# Altium PCB FMCWRadar.PcbDoc (part 1 of 5)
Units mil, origin at the board's own origin, x right, y up, seen from the top; angles counter-clockwise.
Board outline 4763.78 x 3464.57 mil, 6 copper layers (L1, L2(GND), L3, L4, L5(GND), L6), stack 32.112 mil thick; 306 components, 195 nets, 1057 pads, 1126 vias.
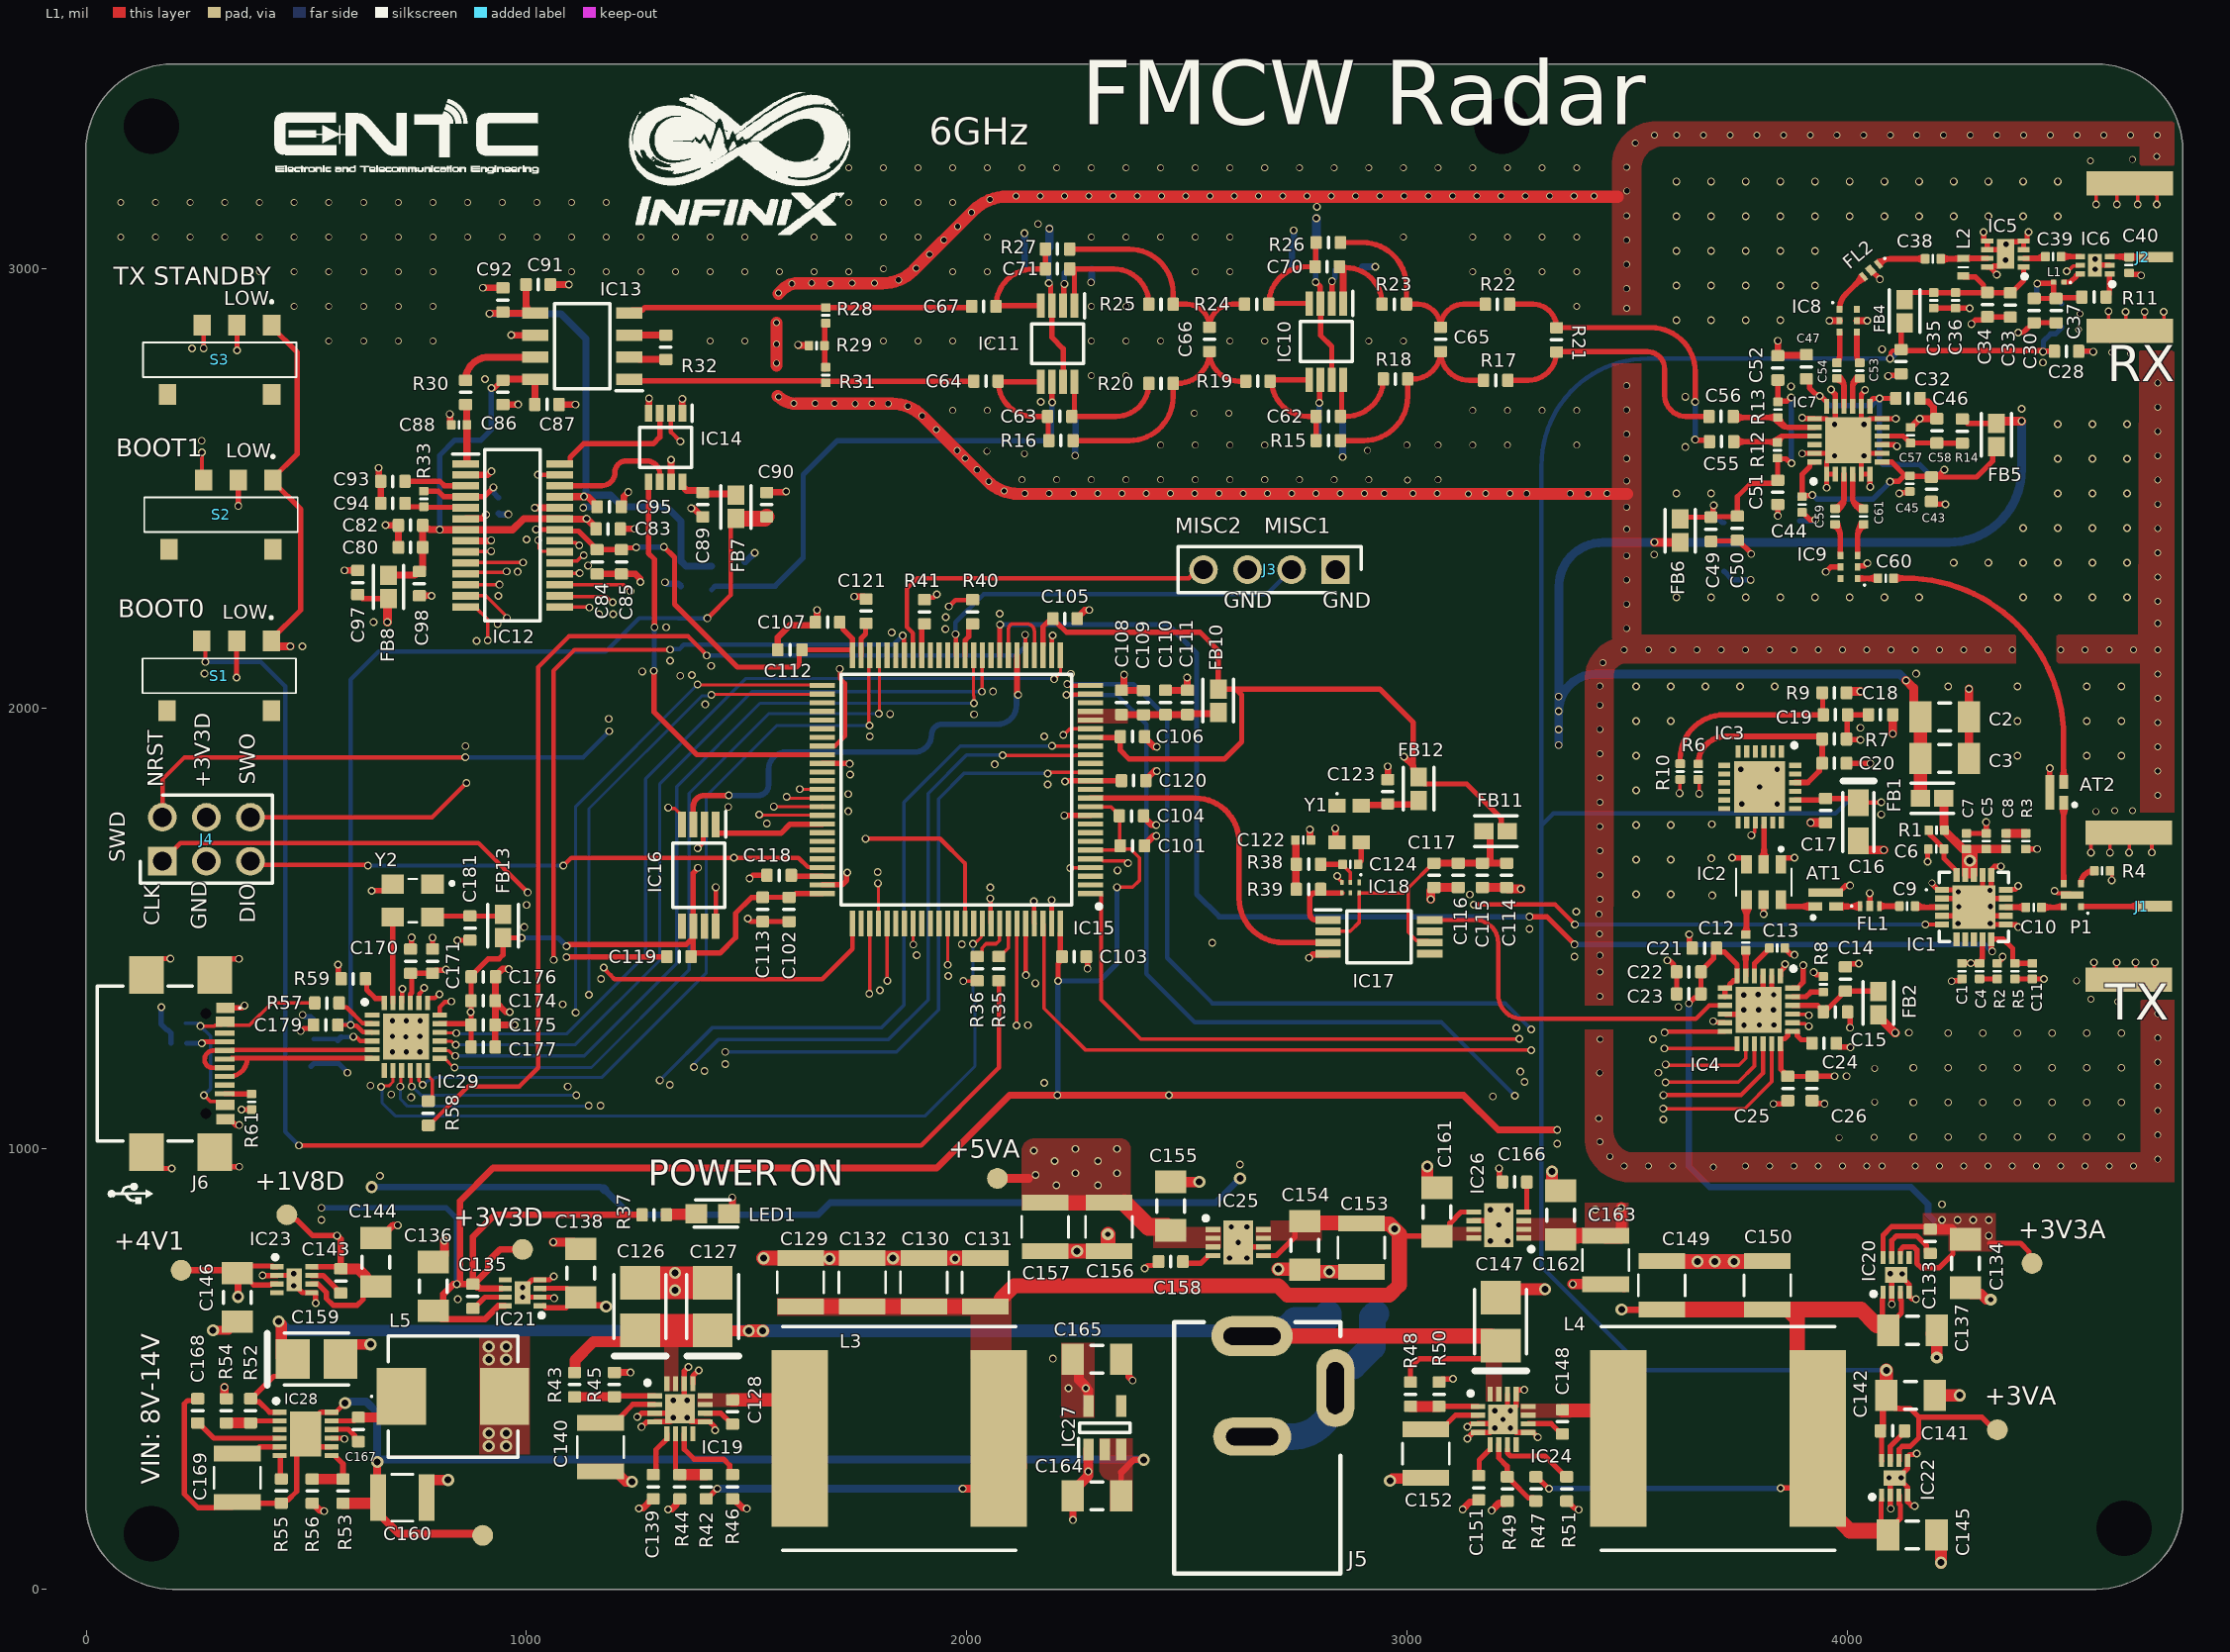
[diagram p0: L1 view]
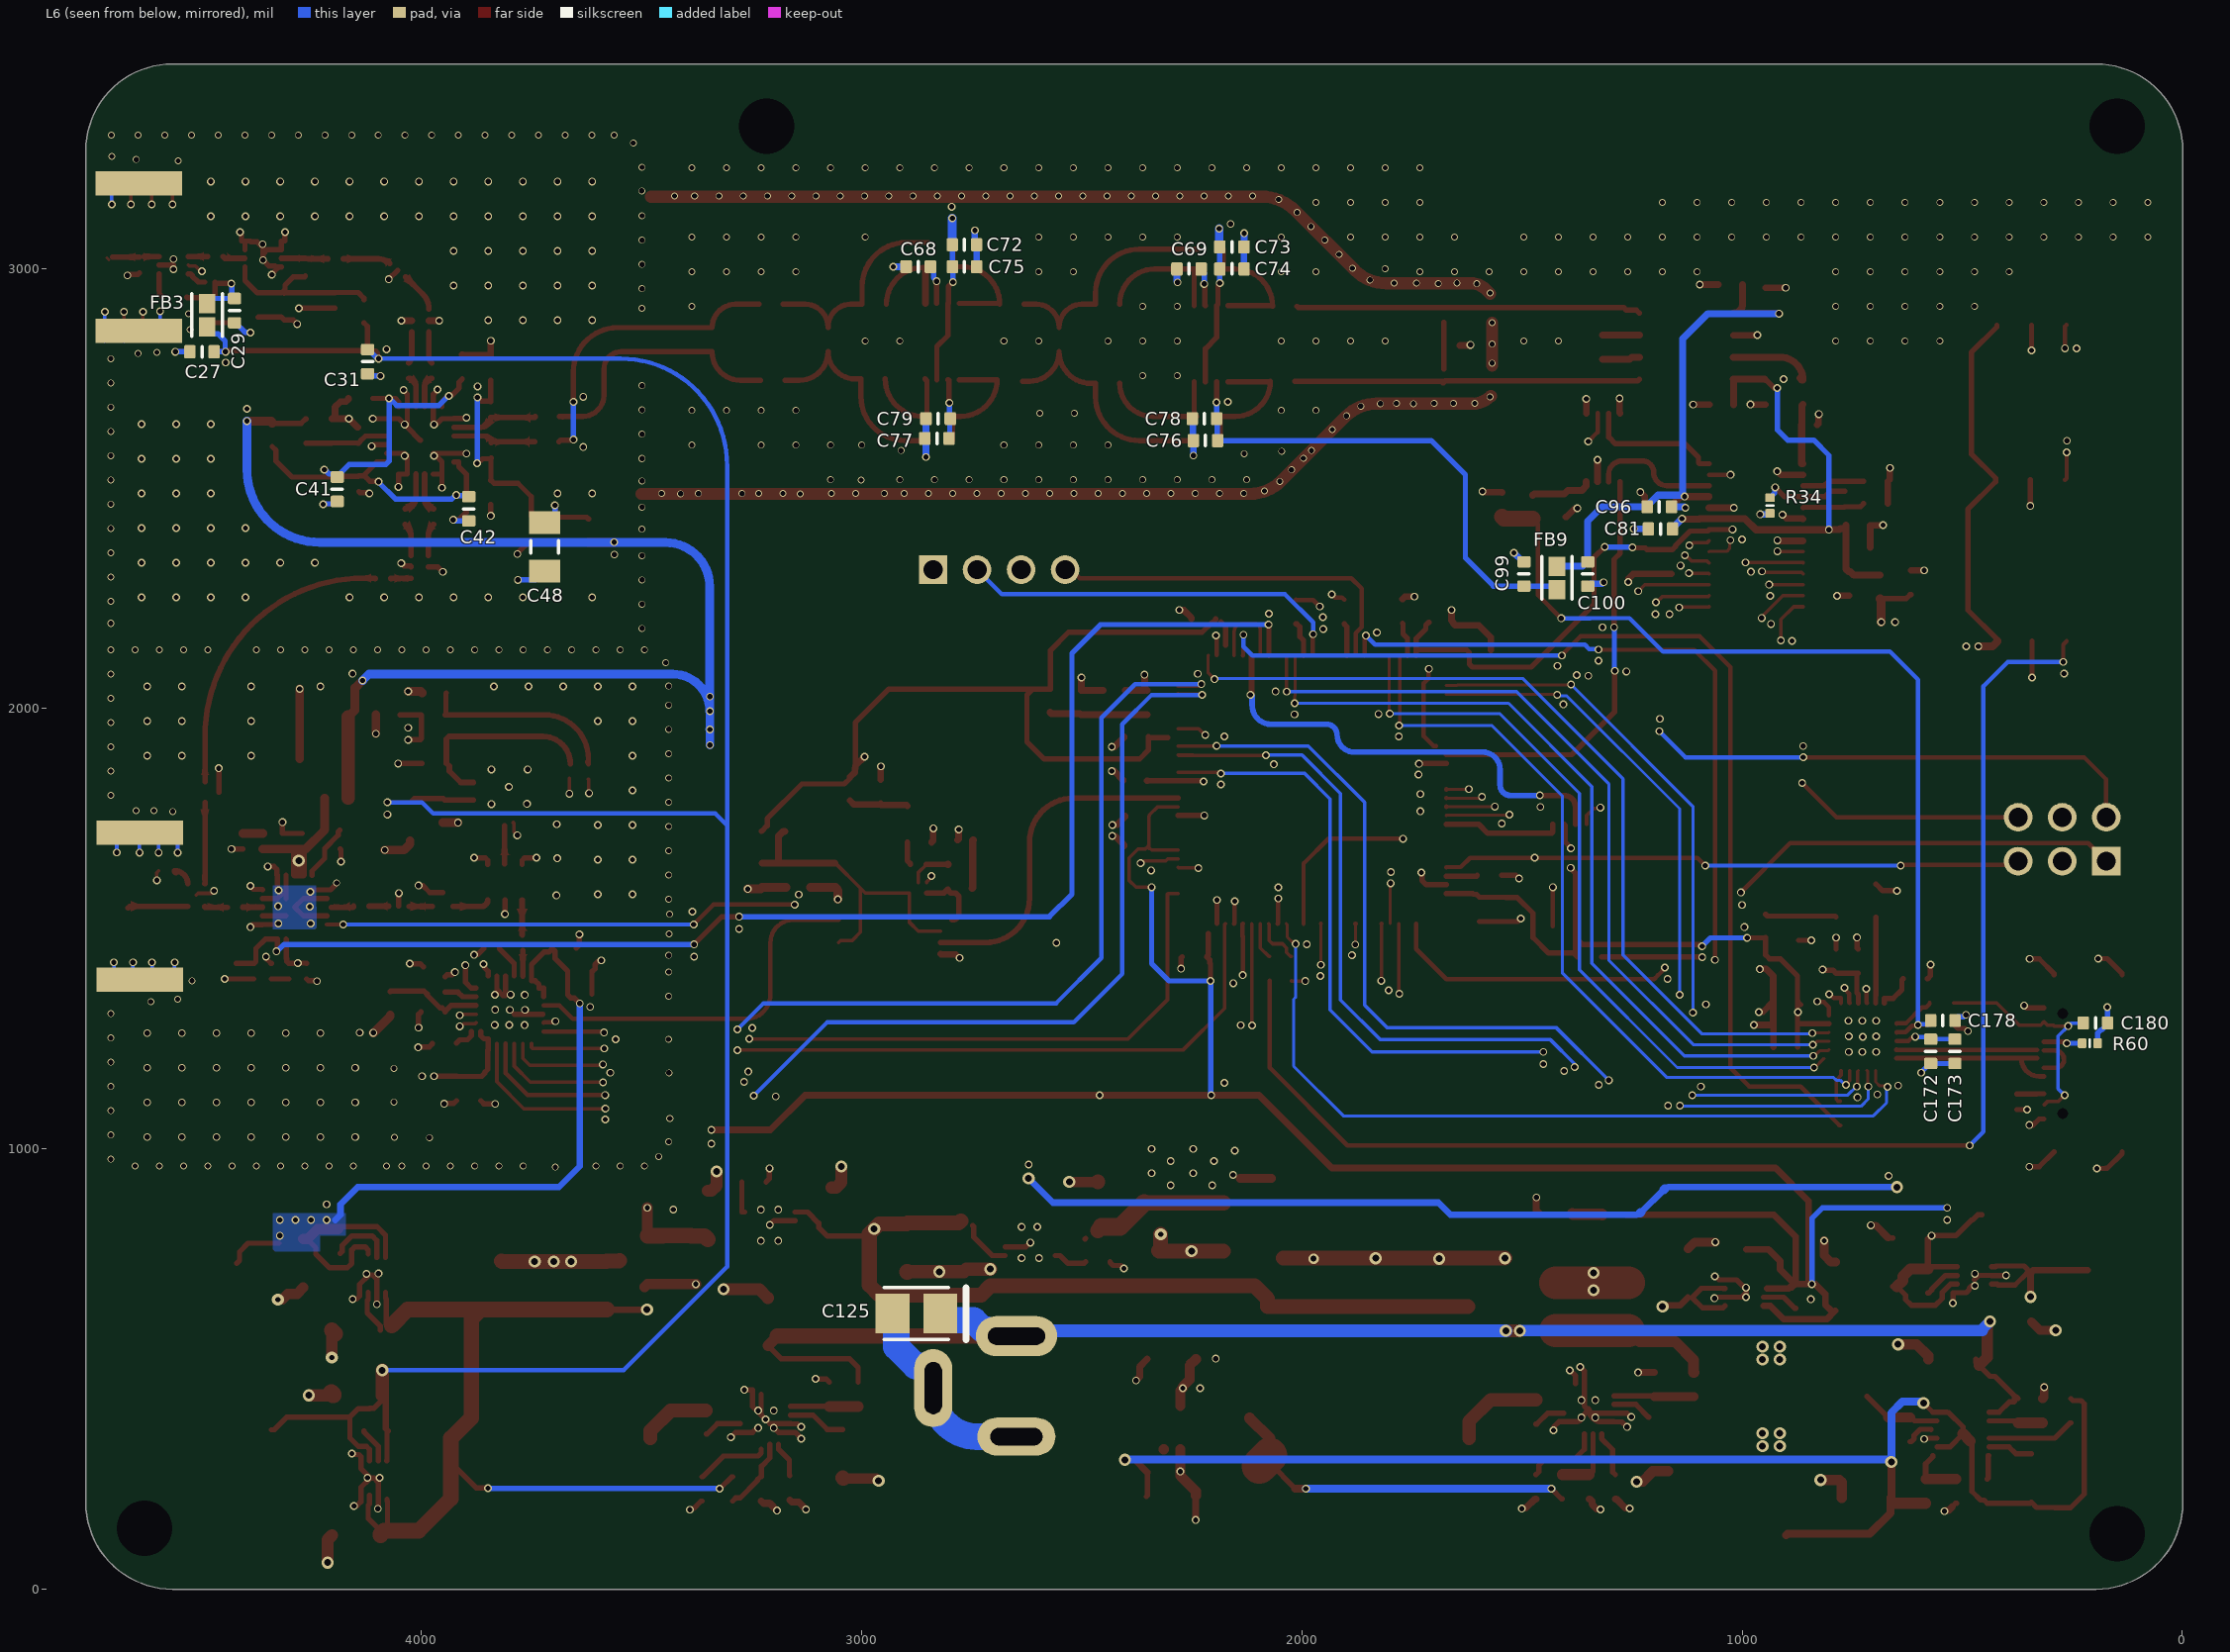
[diagram p1: L6 view, seen from below]
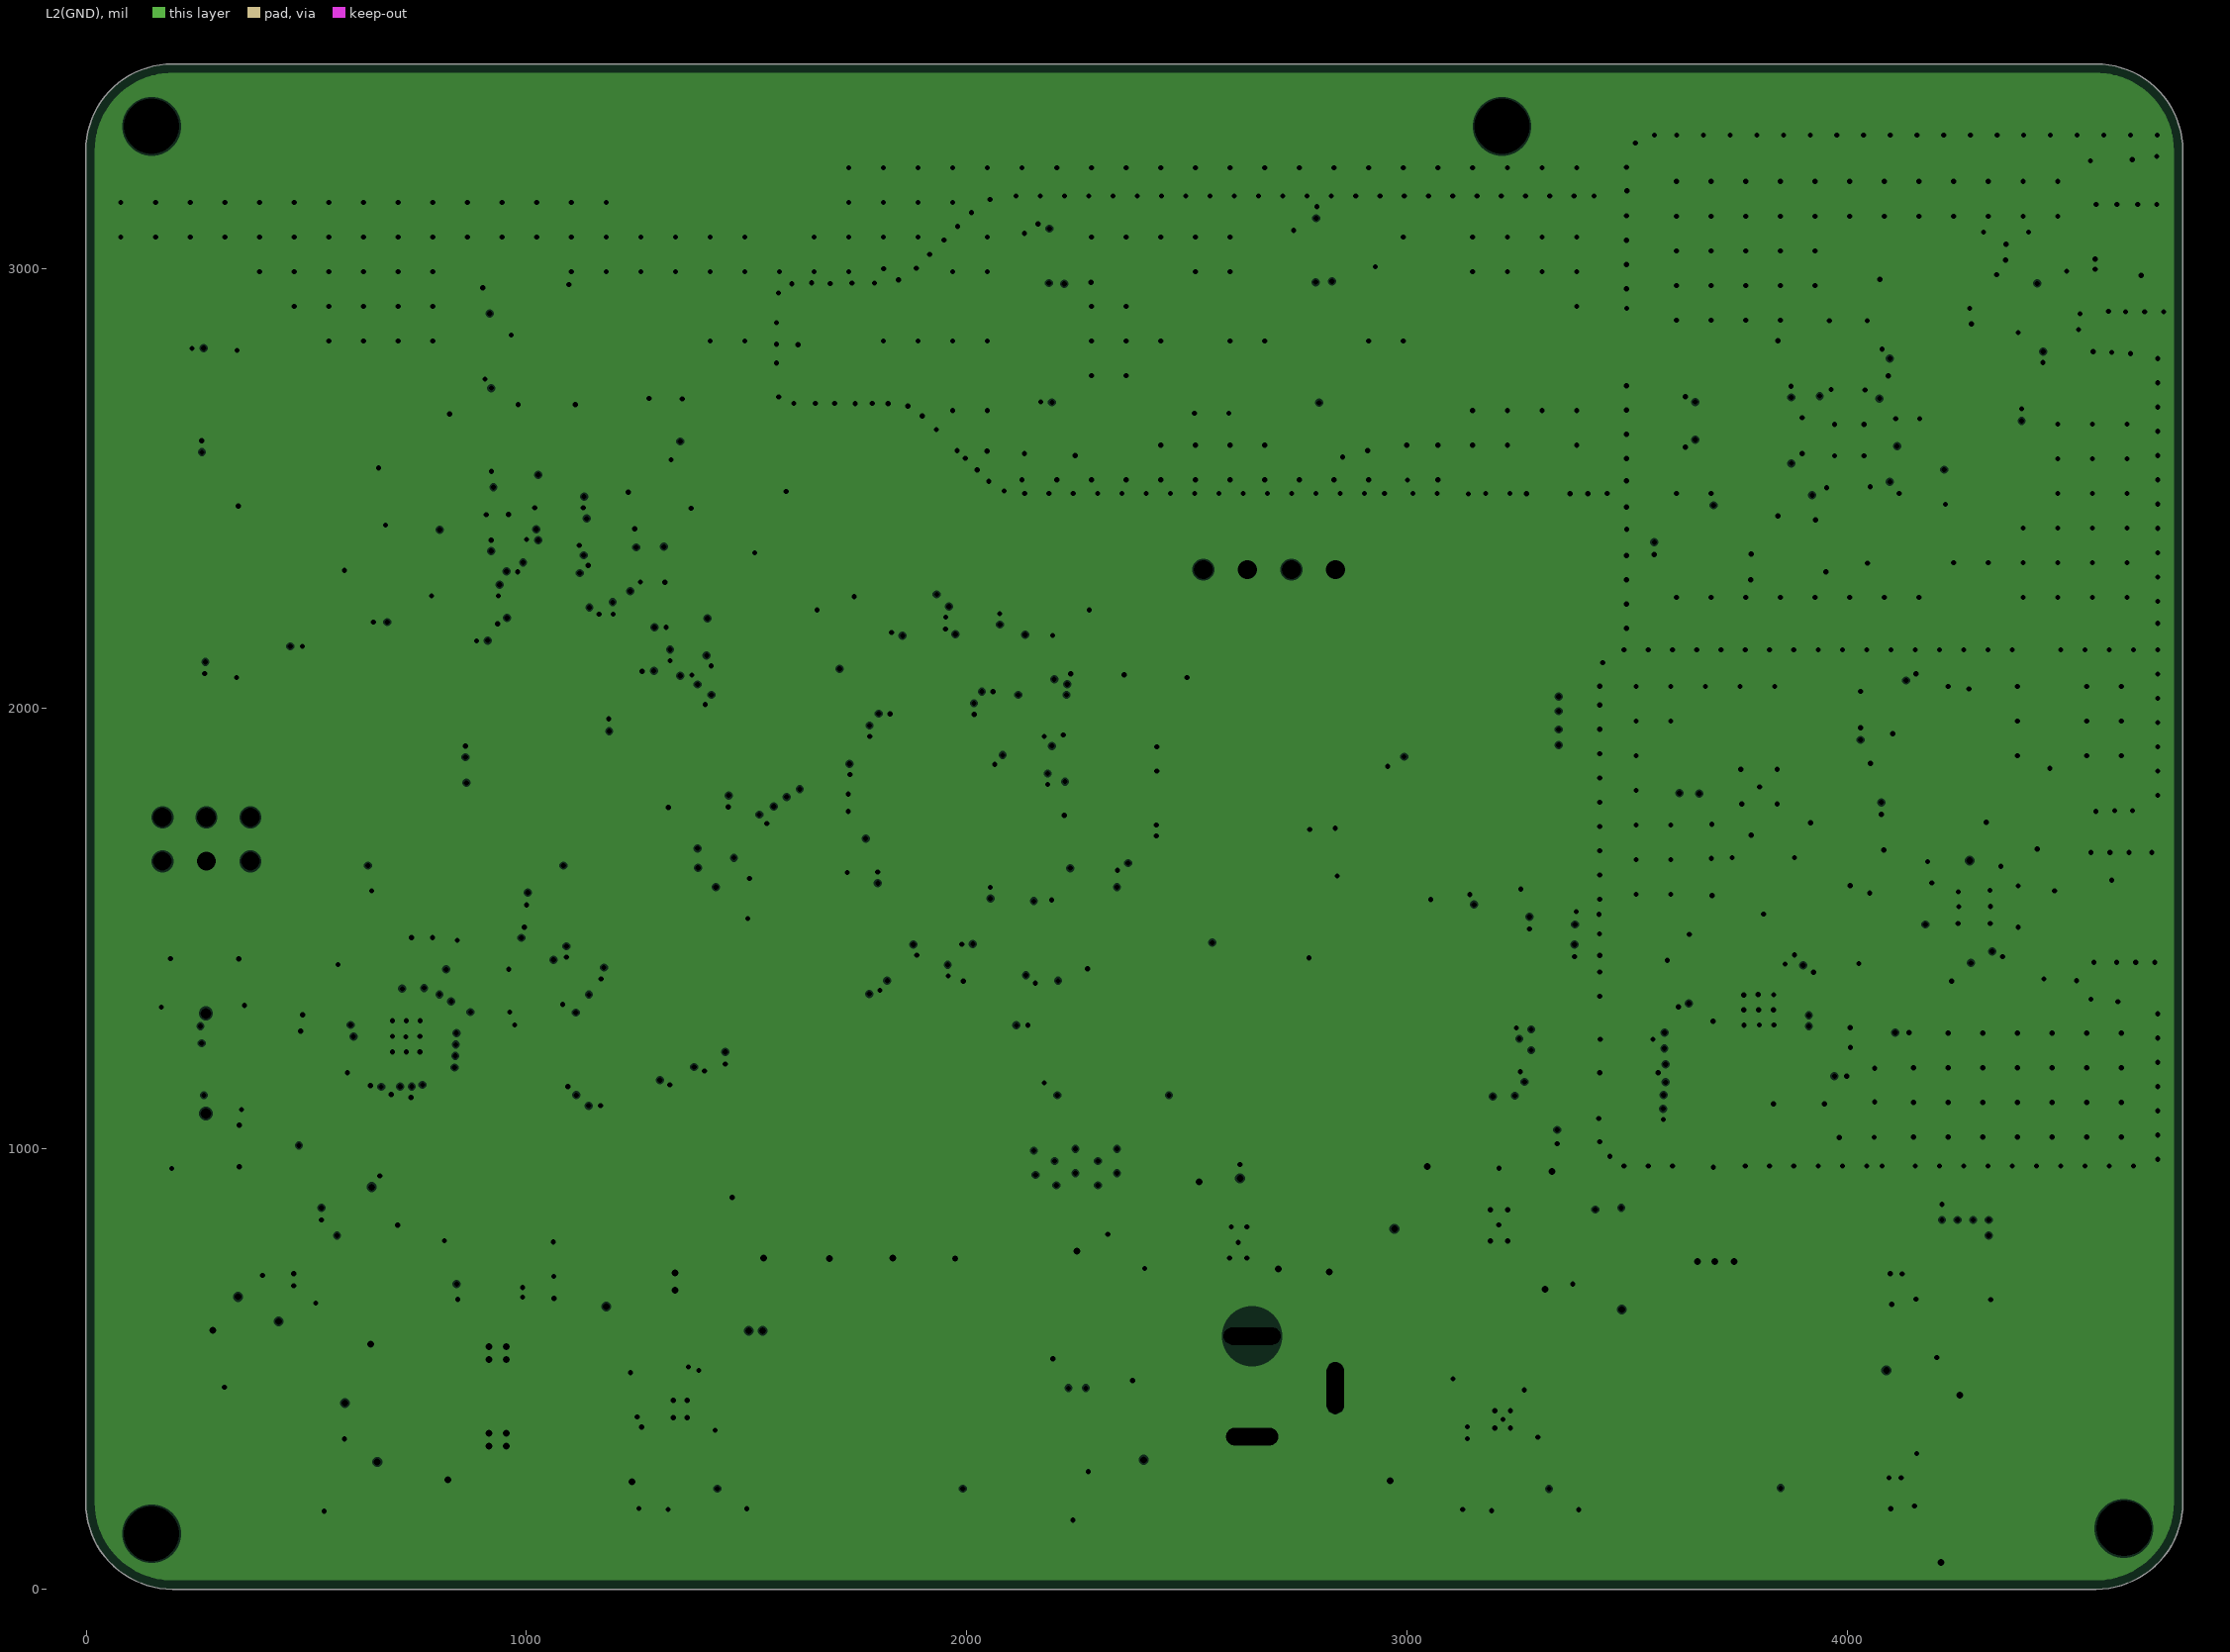
[diagram p2: L2(GND), clearances drawn from the general rule]
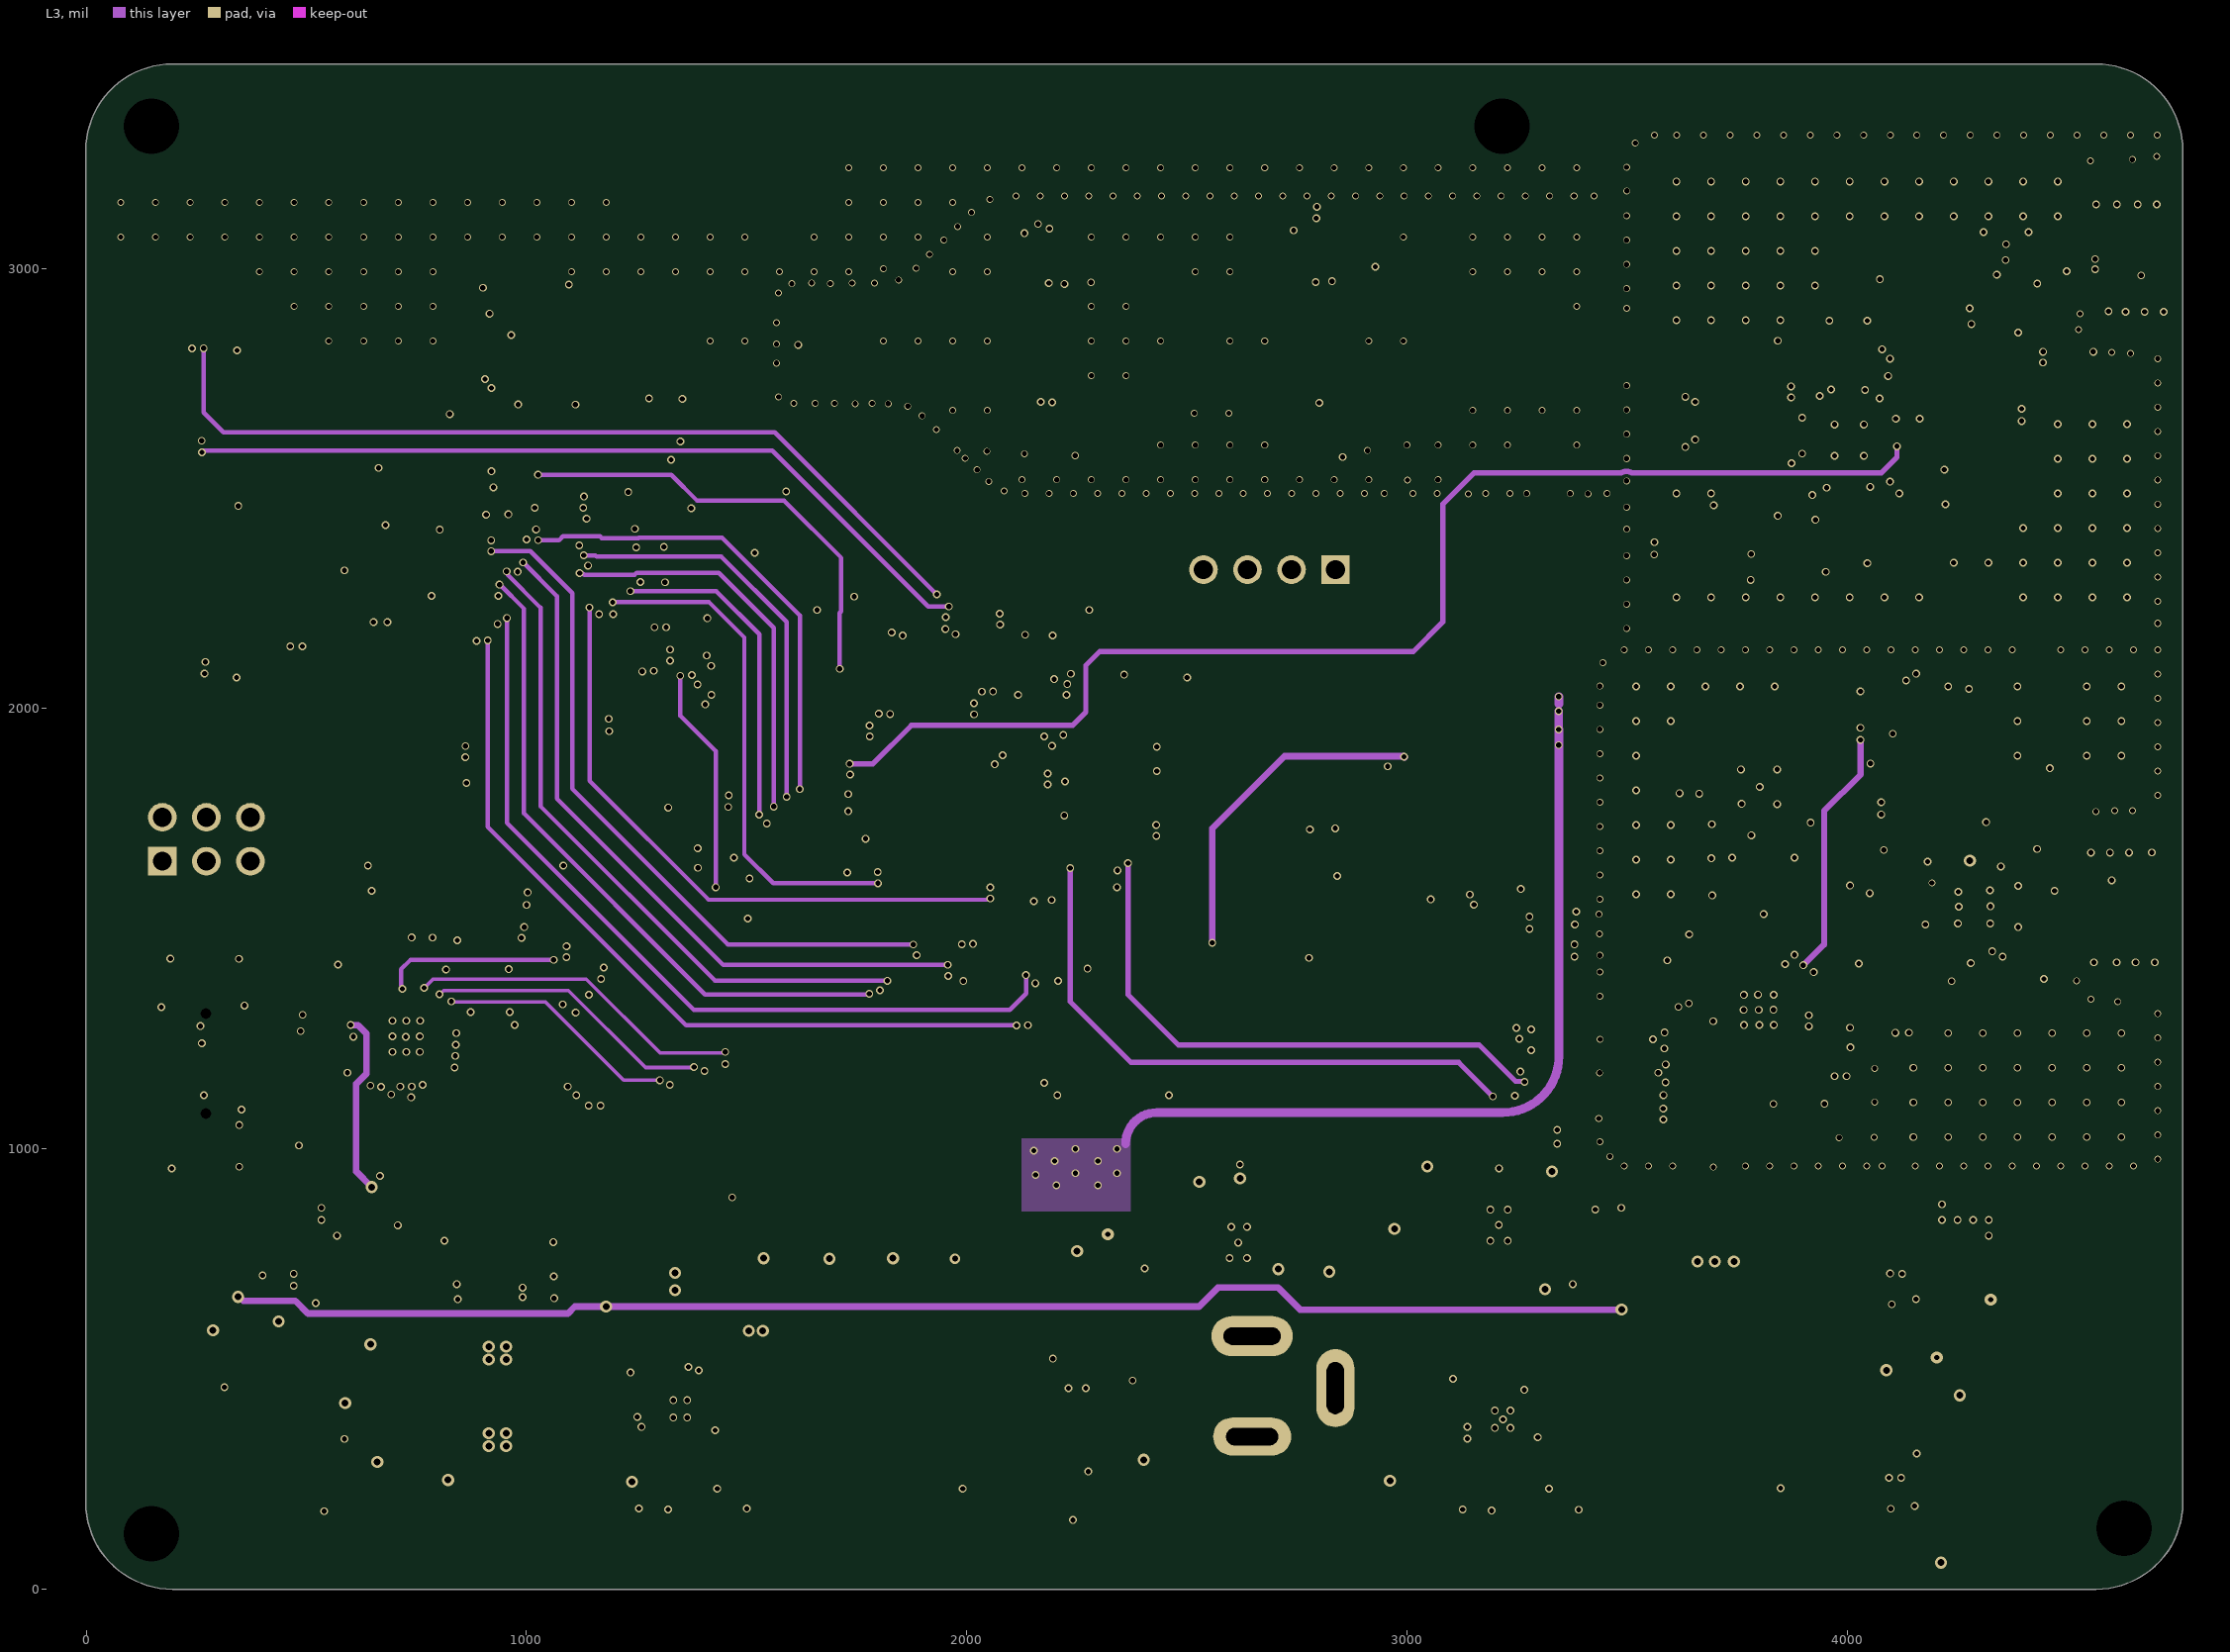
[diagram p3: L3]
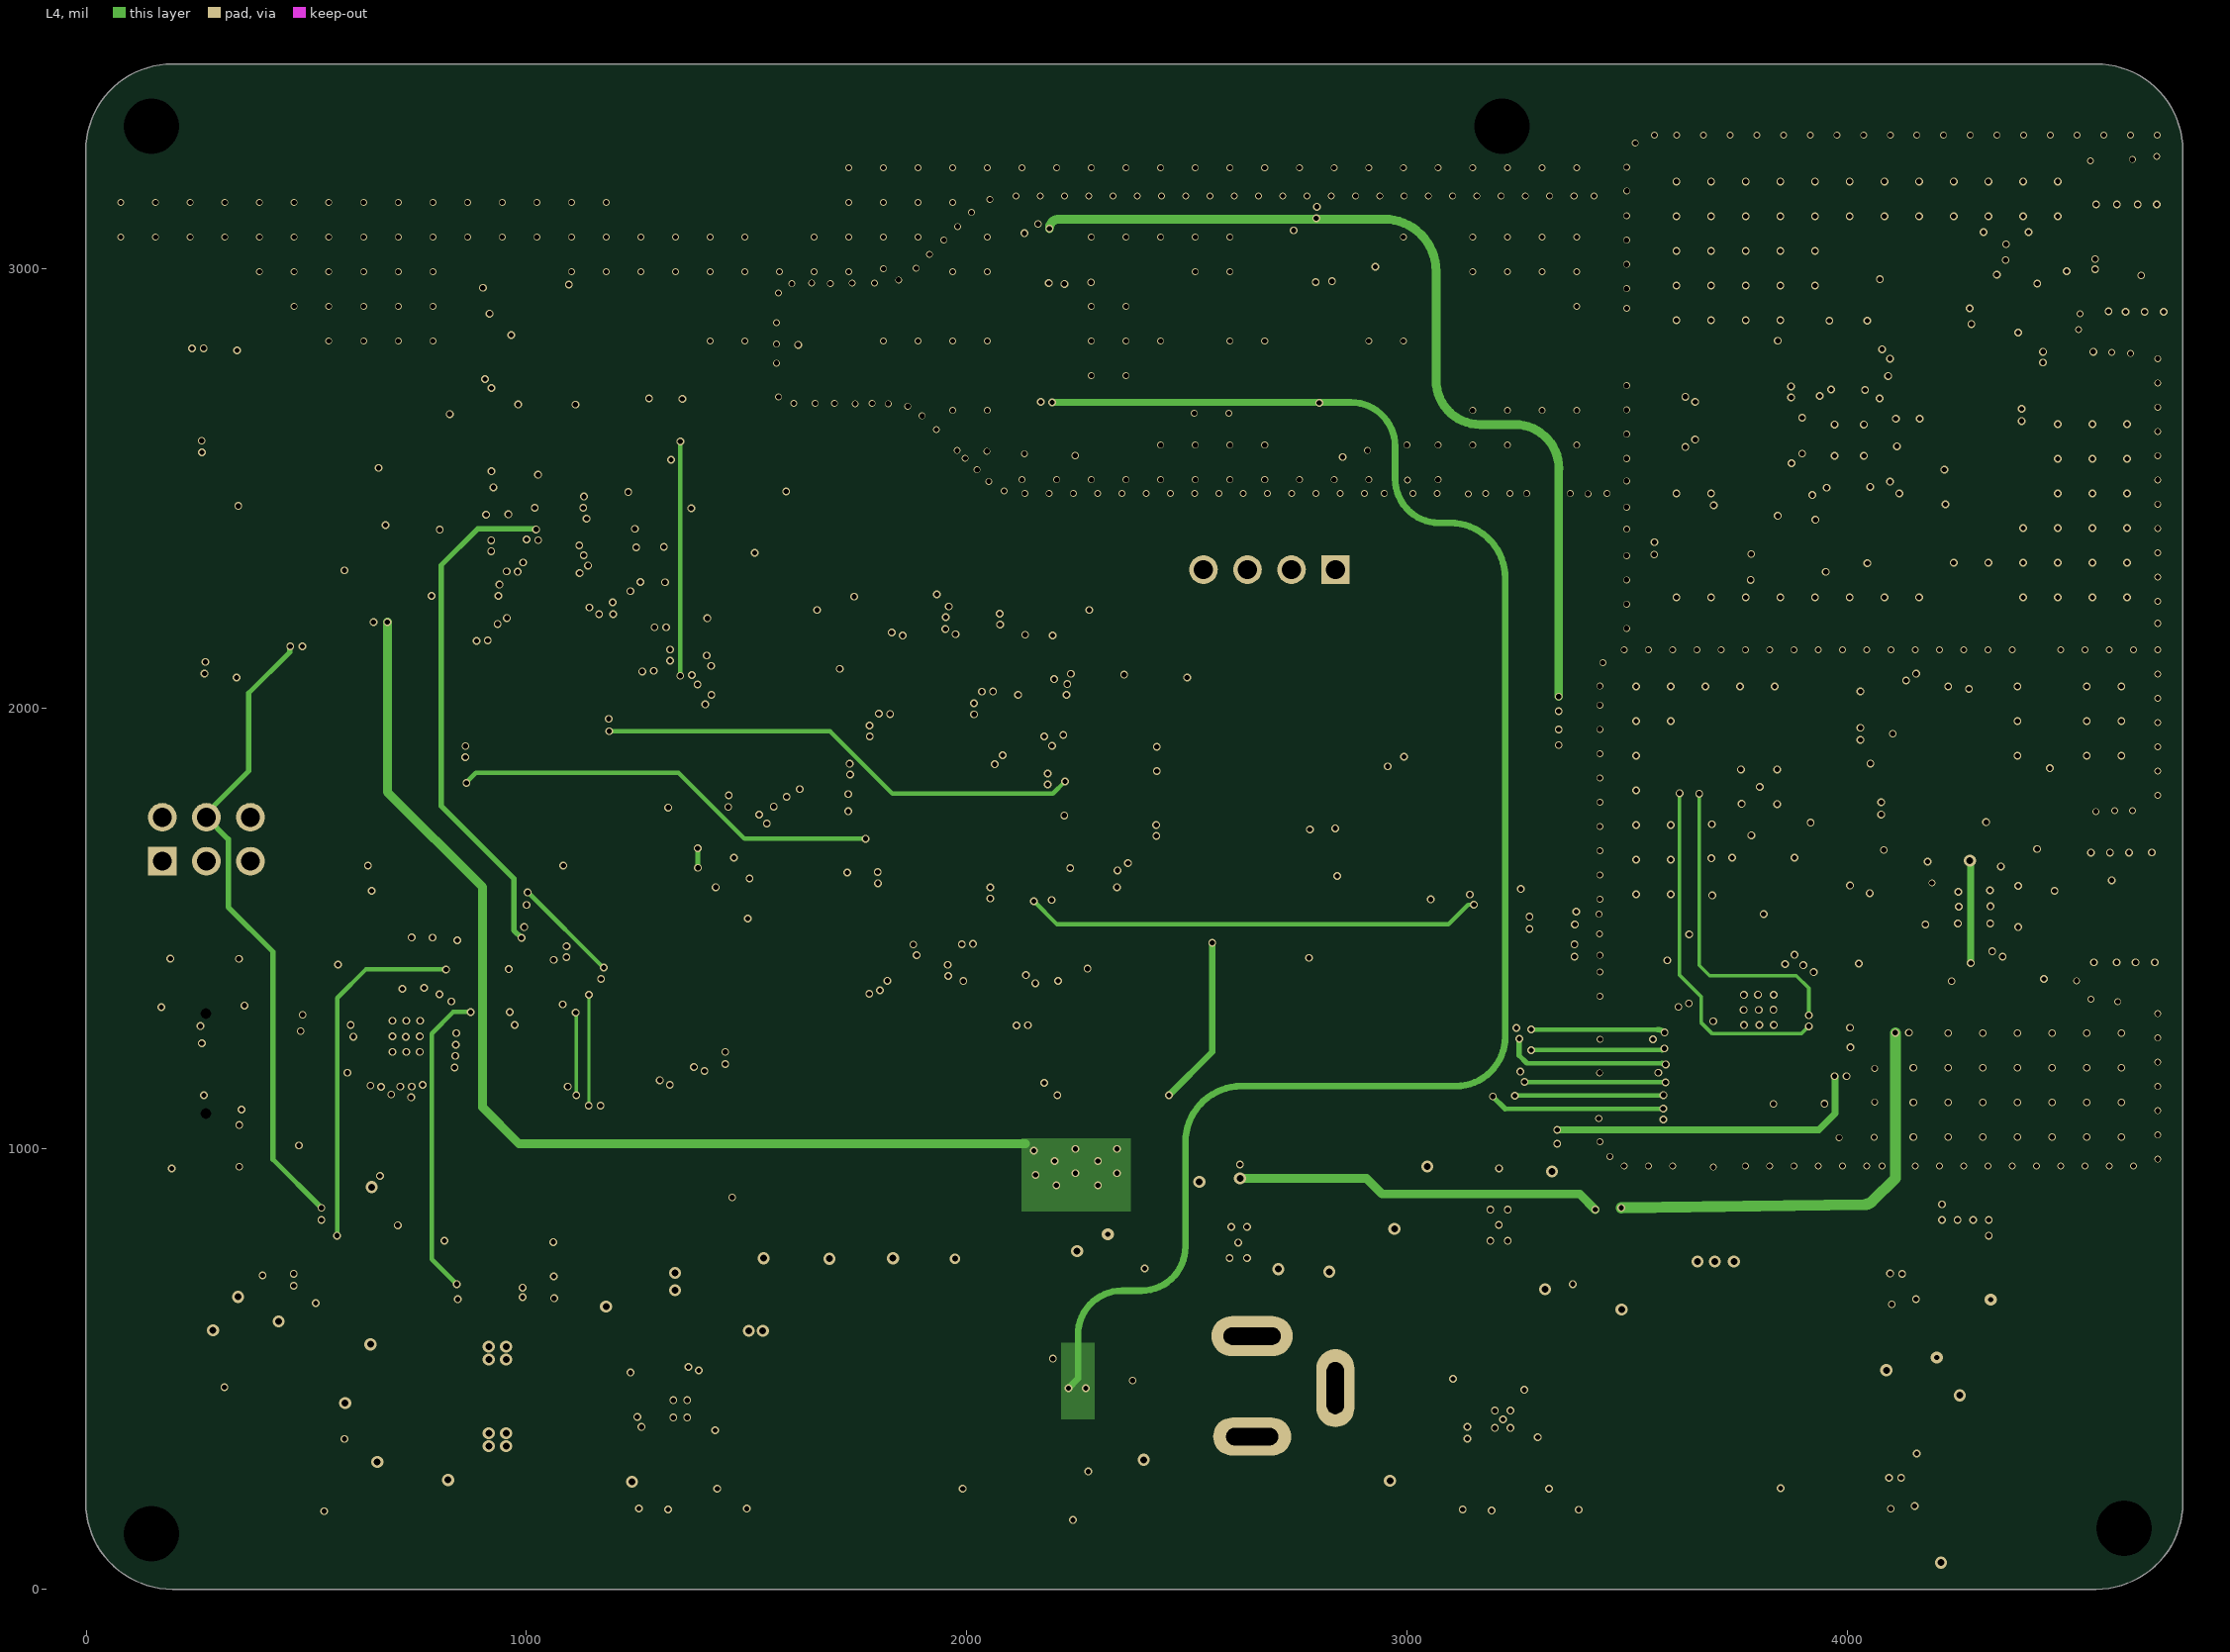
[diagram p4: L4]
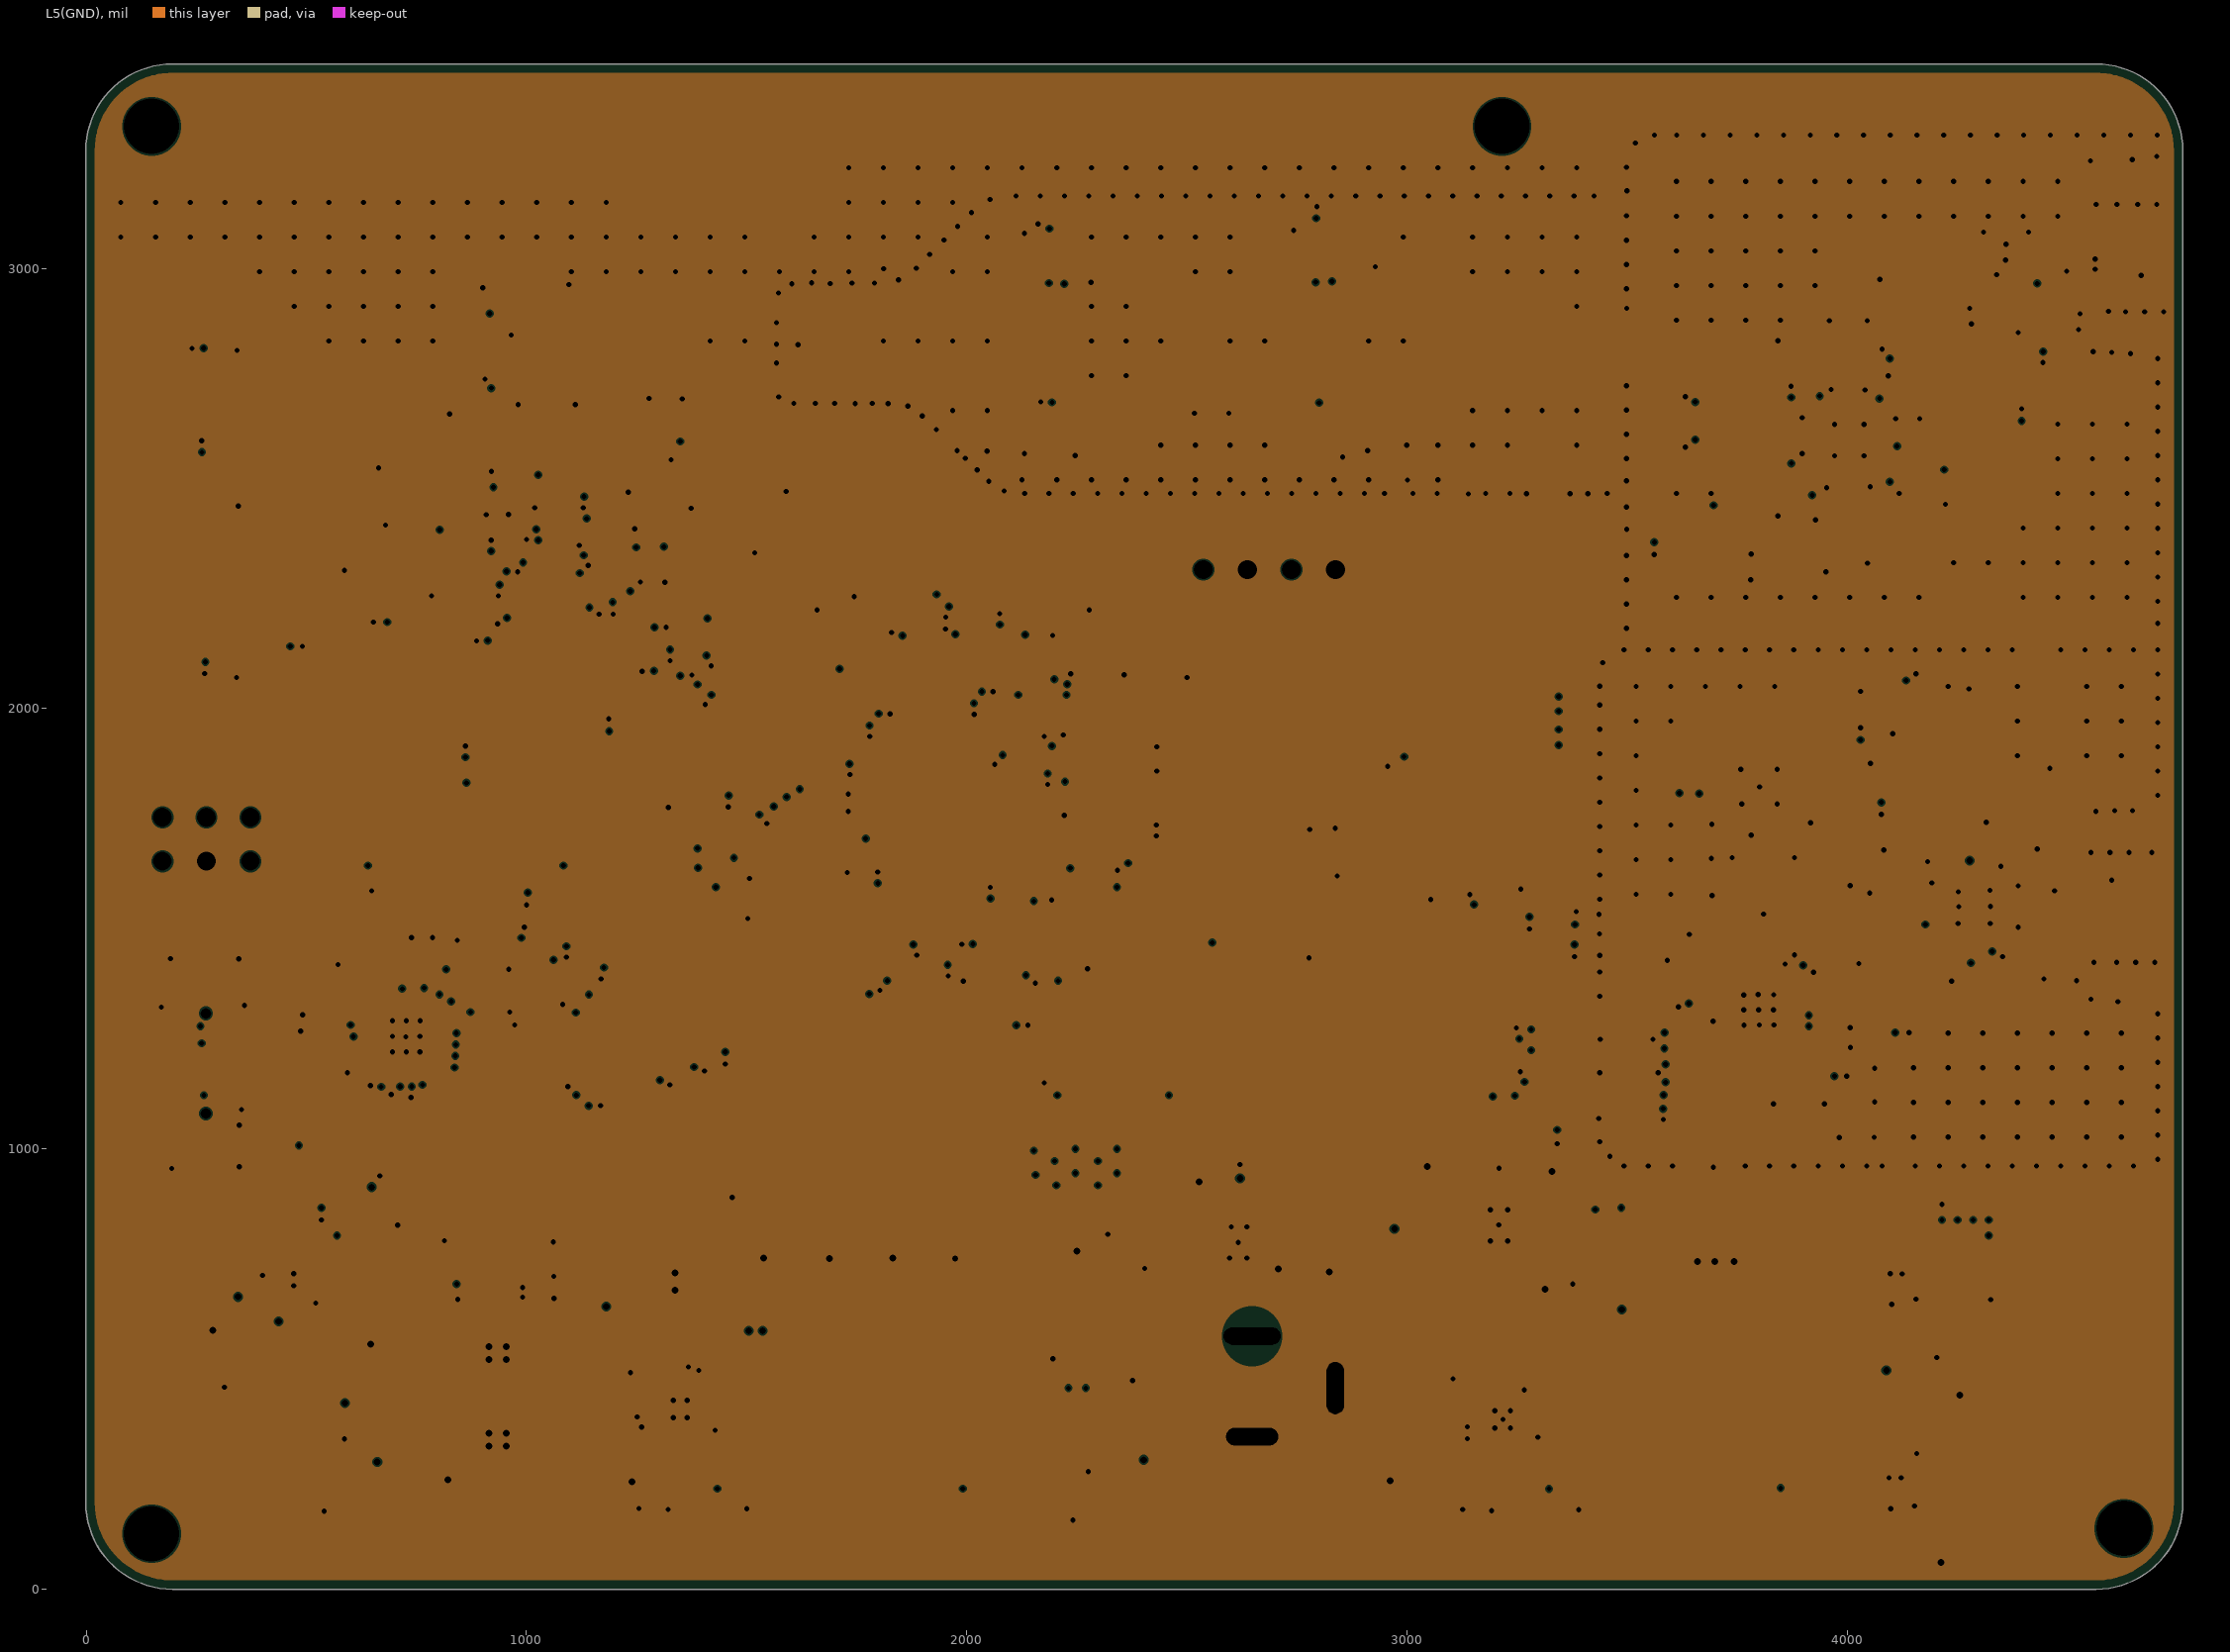
[diagram p5: L5(GND), clearances drawn from the general rule]
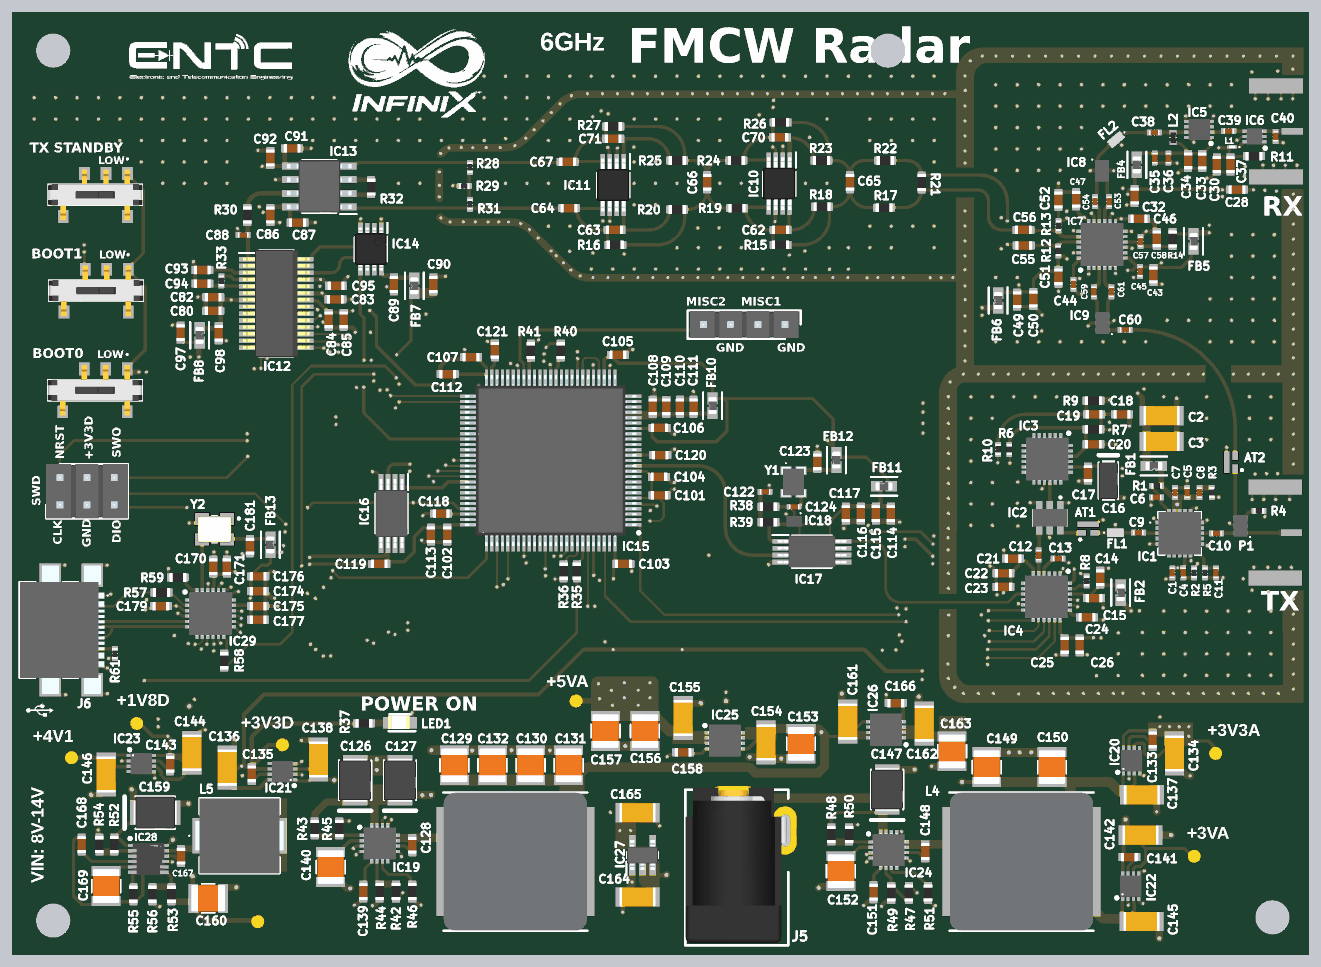
[diagram p9: 3D render of the assembled board from above, using the file's embedded part models]
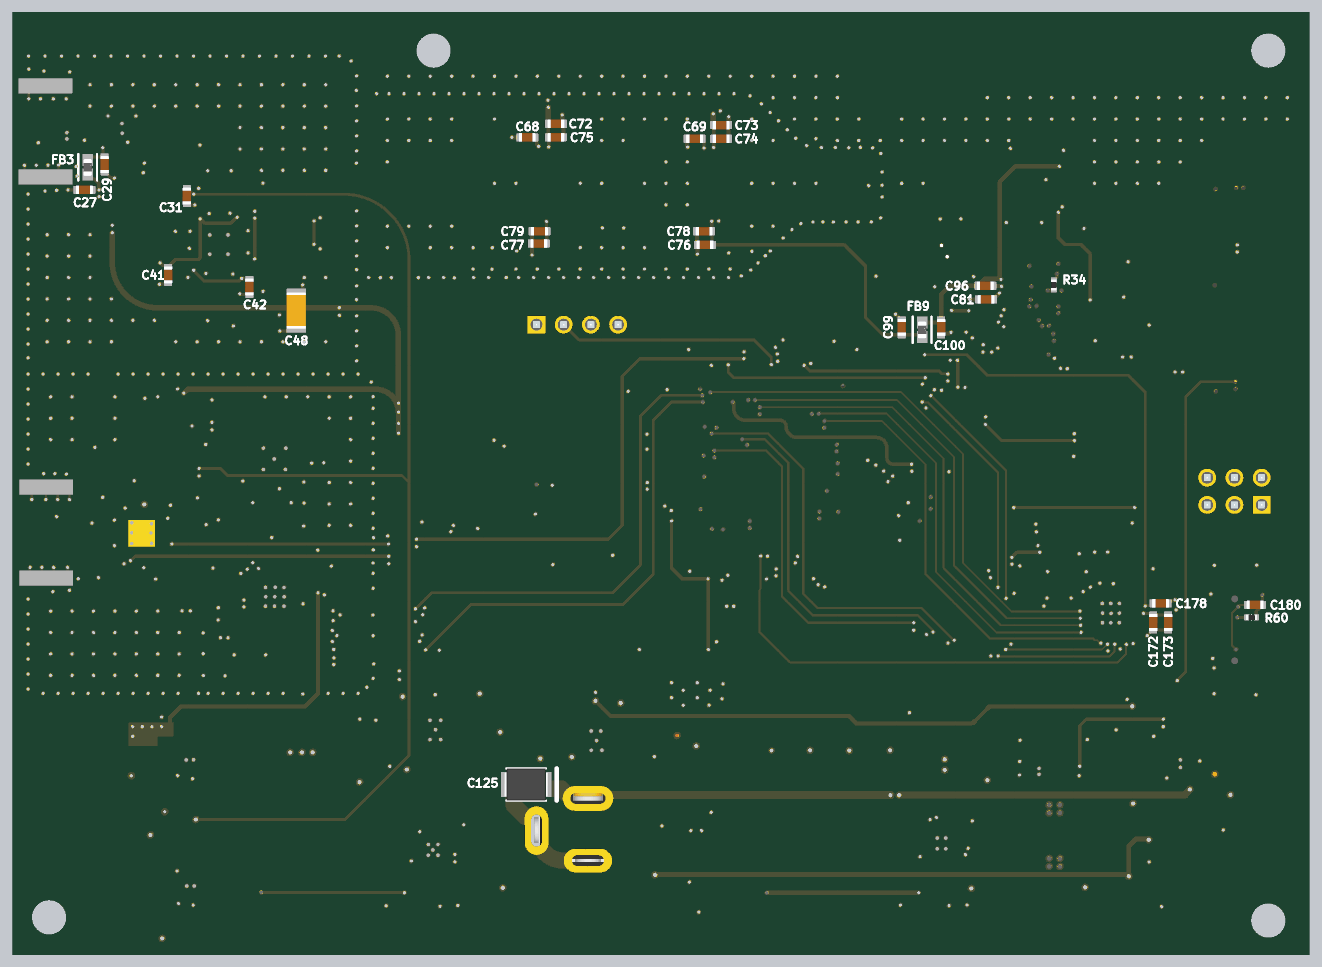
[diagram p10: 3D render of the assembled board from below, using the file's embedded part models]

## Layer stack, top to bottom
Top Solder: solder mask 0.4, Solder Resist, Dk 3.5
L1: signal copper 1.378
Dielectric 2: prepreg 2.8, PP-006, Dk 4.1
L2(GND): plane copper 1.378, net GND
Dielectric 4: prepreg 2.8, PP-006, Dk 4.1
L3: signal copper 1.4
Dielectric 1: dielectric 12.6, FR-4, Dk 4.8
L4: signal copper 1.4
Dielectric 5: prepreg 2.8, PP-006, Dk 4.1
L5(GND): plane copper 1.378, net GND
Dielectric 3: prepreg 2.8, PP-006, Dk 4.1
L6: signal copper 1.378
Bottom Solder: solder mask 0.4, Solder Resist, Dk 3.5

## Board outline
-0.96,196.32 ccw(c195.89,196.32) 195.89,-0.53 4565.97,-0.53 ccw(c4565.97,196.32) 4762.82,196.32 4762.82,3267.19 ccw(c4565.97,3267.19) 4565.97,3464.04 195.89,3464.04 ccw(c195.89,3267.19) -0.96,3267.19

## Design rules (kind name [scope] priority, off if disabled: settings)
BoardOutlineClearance [All] p1: gap=7.87 ignorepadtopadclearanceinfootprint=FALSE
Clearance [All] p1: gap=3.5 ignorepadtopadclearanceinfootprint=FALSE except(5: Arc-Via Track-Via SMDPad-Via THPad-Via Via-Via Via-Fill Via-Poly Via-Region Via-Text; 9.84: Arc-Hole Track-Hole SMDPad-Hole THPad-Hole Via-Hole Fill-Hole Poly-Hole Region-Hole Text-Hole)
ComponentClearance [All] p1: gap=3.5 collisioncheckmode=3 verticalgap=3.5 showdistances=TRUE
DiffPairsRouting [InDifferentialPair('USB')] p1: maxlimit=9 minlimit=8 mostfreqgap=8 toplayer_minwidth=10.92 toplayer_maxwidth=11 toplayer_prefwidth=10.92 midlayer1_minwidth=10.92 midlayer1_maxwidth=11 midlayer1_prefwidth=10.92 midlayer2_minwidth=10.92 midlayer2_maxwidth=11 midlayer2_prefwidth=10.92 bottomlayer_minwidth=10.92 bottomlayer_maxwidth=11 bottomlayer_prefwidth=10.92 maxuncoupledlength=1574.8
Height [All] p1: minheight=0 maxheight=71497.94 prefheight=500
HoleSize [All] p1: absolutevalues=TRUE maxlimit=248.03 minlimit=7.87 maxpercent=80.000 minpercent=20.000
HoleToHoleClearance [All] p1: gap=9.84 allowstackedmicrovias=FALSE
MinimumAnnularRing [All] p1: minimumring=1.97
MinimumSolderMaskSliver [All] p1: minsoldermaskwidth=3.74
PlaneClearance [All] p1: clearance=3.5
PlaneConnect PlaneConnectPowerPads [InPadClass('PowerPads')] p1: planeconnectstyle=Direct reliefexpansion=20 reliefentries=4 reliefconductorwidth=10 reliefairgap=10
PlaneConnect [All] p2: pad.planeconnectstyle=Relief pad.reliefexpansion=11.81 pad.reliefentries=4 pad.reliefconductorwidth=3.5 pad.reliefairgap=3.5 via.planeconnectstyle=Direct via.reliefexpansion=11.81 via.reliefentries=4 via.reliefconductorwidth=5 via.reliefairgap=5
PolygonConnect PolygonConnectPowerPads [All vs (InPadClass('PowerPads'))] p1: connectstyle=Direct reliefconductorwidth=10 reliefentries=4 polygonreliefangle="90 Angle" airgapwidth=10
PolygonConnect [All] p2: connectstyle=Direct reliefconductorwidth=3.5 reliefentries=4 polygonreliefangle="90 Angle" airgapwidth=3.5
RoutingVias [All] p1: holewidth=11.81 width=17.72 viastyle="Through Hole" minholewidth=11.81 minwidth=15.75 maxholewidth=248.03 maxwidth=257.87
SilkToSilkClearance [All] p1: silktosilkclearance=0
SilkToSolderMaskClearance [IsPad] p1: minsilkscreentomaskgap=3.5 clearancetoexposedcopper=TRUE
SolderMaskExpansion [All] p1: expansion=0.39 istentingtop=FALSE
SupplyNets "Schematic Supply Nets_15" [InNet('+3VA')] p1: voltage=0.000
SupplyNets "Schematic Supply Nets_14" [InNet('+3V3D')] p2: voltage=0.000
SupplyNets "Schematic Supply Nets_13" [InNet('+3V3A')] p3: voltage=0.000
SupplyNets "Schematic Supply Nets_12" [InNet('+1V8D')] p4: voltage=0.000
SupplyNets "Schematic Supply Nets_11" [InNet('-5VA_ADC')] p5: voltage=0.000
SupplyNets "Schematic Supply Nets_10" [InNet('+5VA_ADC')] p6: voltage=0.000
SupplyNets "Schematic Supply Nets_9" [InNet('CLK_VDD')] p7: voltage=0.000
SupplyNets "Schematic Supply Nets_8" [InNet('+5VD')] p8: voltage=0.000
SupplyNets "Schematic Supply Nets_7" [InNet('MCU_VDDA')] p9: voltage=0.000
SupplyNets "Schematic Supply Nets_6" [InNet('+12V')] p10: voltage=0.000
SupplyNets "Schematic Supply Nets_5" [InNet('+5VA')] p11: voltage=0.000
SupplyNets "Schematic Supply Nets_4" [InNet('-5VA')] p12: voltage=0.000
SupplyNets "Schematic Supply Nets_3" [InNet('-5V8')] p13: voltage=0.000
SupplyNets "Schematic Supply Nets_2" [InNet('+5V8')] p14: voltage=0.000
SupplyNets "Schematic Supply Nets_1" [InNet('+4V1')] p15: voltage=0.000
SupplyNets "Schematic Supply Nets" [InNet('GND')] p16: voltage=0.000
Width [All] p1: maxlimit=71497.94 minlimit=4 preferedwidth=4.5
20 further rules are at their usual default settings.

## Classes and differential pairs
component class VideoFiltering: C62 C63 C64 C65 C66 C67 C68 C69 C70 C71 C72 C73 C74 C75 C76 C77 C78 C79 IC10 IC11 R15 R16 R17 R18 R19 R20 R21 R22 R23 R24 R25 R26 R27
component class USB: C170 C171 C172 C173 C174 C175 C176 C177 C178 C179 C180 C181 FB13 IC29 J6 R57 R58 R59 R60 R61 Y2
component class Transmitter: *1 AT1 C1 C2 C3 C4 C5 C6 C7 C8 C9 C10 C11 C12 C13 C14 C15 C16 C17 C18 C19 C20 C21 C22 C23 C24 C25 C26 FB1 FB2 FL1 IC1 IC2 IC3 IC4 J1 P1 R1 R2 R3 R4 R5 R6 R7 R8 R9 R10
component class Receiver: C27 C28 C29 C30 C31 C32 C33 C34 C35 C36 C37 C38 C39 C40 FB3 FB4 FL2 IC5 IC6 J2 L1 L2 R11
component class PowerSupply: C125 C126 C127 C128 C129 C130 C131 C132 C133 C134 C135 C136 C137 C138 C139 C140 C141 C142 C143 C144 C145 C146 C147 C148 C149 C150 C151 C152 C153 C154 C155 C156 C157 C158 C159 C160 C161 C162 C163 C164 C165 C166 C167 C168 C169 IC19 IC20 IC21 IC22 IC23 IC24 IC25 IC26 IC27 IC28 J5 J? L3 L4 L5 R42 R43 R44 R45 R46 R47 R48 R49 R50 R51 R52 R53 R54 R55 R56
component class Mixer: AT2 C41 C42 C43 C44 C45 C46 C47 C48 C49 C50 C51 C52 C53 C54 C55 C56 C57 C58 C59 C60 C61 FB5 FB6 IC7 IC8 IC9 R12 R13 R14
component class MCU: C101 C102 C103 C104 C105 C106 C107 C108 C109 C110 C111 C112 C113 C114 C115 C116 C117 C118 C119 C120 C121 C122 C123 C124 FB10 FB11 FB12 IC15 IC16 IC17 IC18 J3 J4 LED1 R35 R36 R37 R38 R39 R40 R41 S1 S2 S3 Y1
component class ADC: C80 C81 C82 C83 C84 C85 C86 C87 C88 C89 C90 C91 C92 C93 C94 C95 C96 C97 C98 C99 C100 FB7 FB8 FB9 IC12 IC13 IC14 R28 R29 R30 R31 R32 R33 R34
net class ULPI-D[0..7]: ULPI-D0 ULPI-D1 ULPI-D2 ULPI-D3 ULPI-D4 ULPI-D5 ULPI-D6 ULPI-D7
net class DCMI-D[11..0]: DCMI-D0 DCMI-D1 DCMI-D2 DCMI-D3 DCMI-D4 DCMI-D5 DCMI-D6 DCMI-D7 DCMI-D8 DCMI-D9 DCMI-D10 DCMI-D11
differential pair USB: +USB_P -USB_N
differential pair MIX_RF: +MIX_RF_P -MIX_RF_N
differential pair MIX_LO: +MIX_LO_P -MIX_LO_N
differential pair MIX_IF: +MIX_IF_P -MIX_IF_N
differential pair FILT_IF: +FILT_IF_P -FILT_IF_N
differential pair BALUN_RF: +BALUN_RF_P -BALUN_RF_N
differential pair BALUN_LO: +BALUN_LO_P -BALUN_LO_N
differential pair ADC_IF: +ADC_IF_P -ADC_IF_N

## Components (designator, comment, footprint, x,y, rotation, side; value= is the part's Value field where it differs from the comment)
AT1 "TFA16C06DBER" ATTN_TFA16C06DBER 3951.76,1566.09 r180 top
AT2 "TFA16C06DBER" ATTN_TFA16C06DBER 4476.29,1809.85 r270 top
C1 "Capacitor 10uF +/-10% 0402" CAPC0402(1005)60_L 4261.16,1403.45 r270 top value="10uF 0402"
C2 "Capacitor 4.7 uF +/- 10% 60 V 1206" CAPC3216X180X50NL20T25 4221.87,1981.09 r180 top value="4u7F 1206"
C3 "Capacitor 4.7 uF +/- 10% 60 V 1206" CAPC3216X180X50NL20T25 4221.87,1886.09 r180 top value="4u7F 1206"
C4 "Capacitor 220pF +/-10% 0402" CAPC0402(1005)60_L 4301.16,1403.45 r270 top value="220pF 0402"
C5 "Capacitor 10uF +/-10% 0402" CAPC0402(1005)60_L 4316.16,1698.45 r90 top value="10uF 0402"
C6 "Capacitor 100nF +/-10% 0402" CAPC0402(1005)60_L 4202.45,1680.73 r0 top value="100nF 0402"
C7 "Capacitor 100nF +/-10% 0402" CAPC0402(1005)60_L 4271.16,1698.45 r270 top value="100nF 0402"
C8 "Capacitor 220pF +/-10% 0402" CAPC0402(1005)60_L 4361.16,1698.45 r90 top value="220pF 0402"
C9 "Capacitor 47nF +/-20% 50V 0402" CAPC0402(1005)60_L 4136.76,1551.09 r0 top value="1p8F 0402"
C10 "Capacitor 47nF +/-20% 50V 0402" CAPC0402(1005)60_L 4423.87,1548.45 r0 top value="1p8F 0402"
C11 "Capacitor 220pF +/-10% 0402" CAPC0402(1005)60_L 4421.16,1403.45 r270 top value="220pF 0402"
C12 "Capacitor 47nF +/-20% 50V 0402" CAPC0402(1005)60_L 3770.04,1468.47 r90 top value="1p8F 0402"
C13 "Capacitor 47nF +/-20% 50V 0402" CAPC0402(1005)60_L 3841.19,1455.69 r0 top value="100pF 0402"
C14 "Capacitor 1µF +/-0.1% 25V 0603" CAPC0603(1608)100_L 3996.19,1385.69 r270 top value="100nF 0603"
C15 "Capacitor 1µF +/-0.1% 25V 0603" CAPC0603(1608)100_L 3973.75,1310.69 r180 top value="10pF 0603"
C16 "TAJA475K016RNJ" AVX-TAJ-A-2_L 4026.19,1742.38 r270 top value="4.7µF 1206"
C17 "Capacitor 1µF +/-0.1% 25V 0603" CAPC0603(1608)100_L 3951.19,1768.13 r90 top value="10nF 0603"
C18 "Capacitor 12nF +/-1% 0603" CAPC0603(1608)100_L 4076.19,1985.69 r180 top value="12nF 0603"
C19 "Capacitor 150nF +/-5% 25V 0603" CAPC0603(1608)100_L 3973.75,1985.69 r0 top value="150nF 0603"
C20 "Capacitor 1µF +/-0.1% 25V 0603" CAPC0603(1608)100_L 3971.19,1875.69 r180 top value="5.6nF 0603"
C21 "Capacitor 1µF +/-0.1% 25V 0603" CAPC0603(1608)100_L 3676.19,1455.69 r0 top value="100nF 0603"
C22 "Capacitor 1µF +/-0.1% 25V 0603" CAPC0603(1608)100_L 3640.63,1401.69 r0 top value="100nF 0603"
C23 "Capacitor 1µF +/-0.1% 25V 0603" CAPC0603(1608)100_L 3640.63,1351.69 r0 top value="10pF 0603"
C24 "Capacitor 1µF +/-0.1% 25V 0603" CAPC0603(1608)100_L 3947.86,1239.63 r180 top value="100nF 0603"
C25 "Capacitor 1µF +/-0.1% 25V 0603" CAPC0603(1608)100_L 3865.56,1136.75 r90 top value="100nF 0603"
C26 "Capacitor 1µF +/-0.1% 25V 0603" CAPC0603(1608)100_L 3920.56,1136.75 r90 top value="10pF 0603"
C27 "Capacitor 1µF +/-0.1% 25V 0603" CAPC0603(1608)100_L 4498.95,2810.49 r0 bottom value="2u2F 0603"
C28 "Capacitor 1µF +/-0.1% 25V 0603" CAPC0603(1608)100_L 4498.6,2811.47 r180 top value="100nF 0603"
C29 "Capacitor 1µF +/-0.1% 25V 0603" CAPC0603(1608)100_L 4425.04,2903.91 r270 bottom value="2u2F 0603"
C30 "Capacitor 1µF +/-0.1% 25V 0603" CAPC0603(1608)100_L 4425.04,2903.91 r90 top value="100nF 0603"
C31 "Capacitor 1µF +/-0.1% 25V 0603" CAPC0603(1608)100_L 4122.76,2788.09 r270 bottom value="2u2F 0603"
C32 "Capacitor 1µF +/-0.1% 25V 0603" CAPC0603(1608)100_L 4122.76,2788.09 r90 top value="100nF 0603"
C33 "Capacitor 1µF +/-0.1% 25V 0603" CAPC0603(1608)100_L 4371.04,2916.47 r90 top value="100pF 0603"
C34 "Capacitor 1µF +/-0.1% 25V 0603" CAPC0603(1608)100_L 4319.04,2917.47 r270 top value="2u2F 0603"
C35 "Capacitor 47nF +/-20% 50V 0402" CAPC0402(1005)60_L 4196.76,2927.09 r90 top value="10pF 0402"
C36 "Capacitor 47nF +/-20% 50V 0402" CAPC0402(1005)60_L 4246.76,2927.09 r90 top value="10nF 0402"
C37 "Capacitor 1µF +/-0.1% 25V 0603" CAPC0603(1608)100_L 4475.04,2903.91 r90 top value="100nF 0603"
C38 "Capacitor 47nF +/-20% 50V 0402" CAPC0402(1005)60_L 4195.32,3021.47 r0 top value="1p8F 0402"
C39 "Capacitor 47nF +/-20% 50V 0402" CAPC0402(1005)60_L 4468.32,3026.47 r0 top value="1p8F 0402"
C40 "Capacitor 220pF +/-10% 0402" CAPC0402(1005)60_L 4640.77,3007.35 r90 top value="0p5F 0402"
C41 "Capacitor 1µF +/-0.1% 25V 0603" CAPC0603(1608)100_L 4191.76,2498.09 r270 bottom value="2u2F 0603"
C42 "Capacitor 1µF +/-0.1% 25V 0603" CAPC0603(1608)100_L 3892.75,2453.65 r90 bottom value="100nF 0603"
C43 "Capacitor 1µF +/-0.1% 25V 0603" CAPC0603(1608)100_L 4191.76,2498.09 r90 top value="100nF 0603"
C44 "Capacitor 47nF +/-20% 50V 0402" CAPC0402(1005)60_L 3897.76,2463.37 r90 top value="100pF 0402"
C45 "Capacitor 47nF +/-20% 50V 0402" CAPC0402(1005)60_L 4142.76,2510.8 r90 top value="100pF 0402"
C46 "Capacitor 1µF +/-0.1% 25V 0603" CAPC0603(1608)100_L 4138.6,2704.47 r180 top value="100nF 0603"
C47 "Capacitor 1µF +/-0.1% 25V 0603" CAPC0603(1608)100_L 3907.76,2776.09 r270 top value="100nF 0603"
C48 "Capacitor 4.7 uF +/- 10% 60 V 1206" CAPC3216X180X50NL20T25 3720.76,2366.97 r90 bottom value="4u7F 1206"
C49 "Capacitor 1µF +/-0.1% 25V 0603" CAPC0603(1608)100_L 3690.76,2407.09 r270 top value="2u2F 0603"
C50 "Capacitor 1µF +/-0.1% 25V 0603" CAPC0603(1608)100_L 3750.75,2409.65 r270 top value="2u2F 0603"
C51 "Capacitor 1µF +/-0.1% 25V 0603" CAPC0603(1608)100_L 3842.76,2491.09 r90 top value="100nF 0603"
C52 "Capacitor 1µF +/-0.1% 25V 0603" CAPC0603(1608)100_L 3842.75,2773.65 r270 top value="100nF 0603"
C53 "Capacitor 47nF +/-20% 50V 0402" CAPC0402(1005)60_L 4029.04,2767.47 r270 top value="1p8F 0402"
C54 "Capacitor 47nF +/-20% 50V 0402" CAPC0402(1005)60_L 3977.04,2767.47 r270 top value="1p8F 0402"
C55 "Capacitor 82nF +/-0.1% 25V 0603" CAPC0603(1608)100_L 3715.2,2606.09 r0 top value="10nF 0603"
C56 "Capacitor 82nF +/-0.1% 25V 0603" CAPC0603(1608)100_L 3714.04,2663.47 r0 top value="10nF 0603"
C57 "Capacitor 47nF +/-20% 50V 0402" CAPC0402(1005)60_L 4144.04,2620.76 r270 top value="100pF 0402"
C58 "Capacitor 1µF +/-0.1% 25V 0603" CAPC0603(1608)100_L 4204.04,2630.76 r270 top value="100nF 0603"
C59 "Capacitor 47nF +/-20% 50V 0402" CAPC0402(1005)60_L 3972.76,2436.09 r90 top value="1p8F 0402"
C60 "Capacitor 47nF +/-20% 50V 0402" CAPC0402(1005)60_L 4087.76,2296.09 r180 top value="1p8F 0402"
C61 "Capacitor 47nF +/-20% 50V 0402" CAPC0402(1005)60_L 4037.76,2436.09 r90 top value="1p8F 0402"
C62 "Capacitor 1µF +/-0.1% 25V 0603" CAPC0603(1608)100_L 2821.64,2663.53 r0 top value="100pF 0603"
C63 "Capacitor 1µF +/-0.1% 25V 0603" CAPC0603(1608)100_L 2211.64,2663.53 r0 top value="100pF 0603"
C64 "Capacitor 1µF +/-0.1% 25V 0603" CAPC0603(1608)100_L 2044.08,2743.53 r0 top value="3n3F 0603"
C65 "Capacitor 1µF +/-0.1% 25V 0603" CAPC0603(1608)100_L 3076.64,2838.53 r90 top value="270pF 0603"
C66 "Capacitor 1µF +/-0.1% 25V 0603" CAPC0603(1608)100_L 2551.64,2838.53 r90 top value="3nF 0603"
C67 "Capacitor 1µF +/-0.1% 25V 0603" CAPC0603(1608)100_L 2039.08,2913.53 r0 top value="3n3F 0603"
C68 "Capacitor 1µF +/-0.1% 25V 0603" CAPC0603(1608)100_L 2871.64,3003.53 r180 bottom value="1uF 0603"
C69 "Capacitor 1µF +/-0.1% 25V 0603" CAPC0603(1608)100_L 2256.64,2998.53 r180 bottom value="1uF 0603"
C70 "Capacitor 1µF +/-0.1% 25V 0603" CAPC0603(1608)100_L 2819.08,3003.53 r0 top value="100pF 0603"
C71 "Capacitor 1µF +/-0.1% 25V 0603" CAPC0603(1608)100_L 2206.64,2998.53 r0 top value="100pF 0603"
C72 "Capacitor 1µF +/-0.1% 25V 0603" CAPC0603(1608)100_L 2766.64,3053.53 r180 bottom value="2u2F 0603"
C73 "Capacitor 1µF +/-0.1% 25V 0603" CAPC0603(1608)100_L 2159.08,3048.53 r180 bottom value="2u2F 0603"
C74 "Capacitor 1µF +/-0.1% 25V 0603" CAPC0603(1608)100_L 2159.2,2998.53 r0 bottom value="100nF 0603"
C75 "Capacitor 1µF +/-0.1% 25V 0603" CAPC0603(1608)100_L 2766.64,3003.53 r0 bottom value="100nF 0603"
C76 "Capacitor 1µF +/-0.1% 25V 0603" CAPC0603(1608)100_L 2219.08,2608.53 r0 bottom value="2u2F 0603"
C77 "Capacitor 1µF +/-0.1% 25V 0603" CAPC0603(1608)100_L 2829.2,2613.53 r0 bottom value="2u2F 0603"
C78 "Capacitor 1µF +/-0.1% 25V 0603" CAPC0603(1608)100_L 2221.64,2658.53 r180 bottom value="100nF 0603"
C79 "Capacitor 1µF +/-0.1% 25V 0603" CAPC0603(1608)100_L 2826.64,2658.53 r180 bottom value="100nF 0603"
C80 "Capacitor 1µF +/-0.1% 25V 0603" CAPC0603(1608)100_L 736.76,2366.09 r0 top value="1uF 0603"
C81 "Capacitor 1µF +/-0.1% 25V 0603" CAPC0603(1608)100_L 1185.76,2408.09 r180 bottom value="1uF 0603"
C82 "Capacitor 1µF +/-0.1% 25V 0603" CAPC0603(1608)100_L 736.76,2416.09 r0 top value="100nF 0603"
C83 "Capacitor 1µF +/-0.1% 25V 0603" CAPC0603(1608)100_L 1185.76,2408.09 r180 top value="100nF 0603"
C84 "Capacitor 1µF +/-0.1% 25V 0603" CAPC0603(1608)100_L 1160.76,2333.09 r90 top value="100nF 0603"
C85 "Capacitor 1µF +/-0.1% 25V 0603" CAPC0603(1608)100_L 1215.76,2333.09 r90 top value="1uF 0603"
C86 "Capacitor 1µF +/-0.1% 25V 0603" CAPC0603(1608)100_L 946.76,2718.09 r90 top value="100nF 0603"
C87 "Capacitor 1µF +/-0.1% 25V 0603" CAPC0603(1608)100_L 1046.6,2690.47 r180 top value="1uF 0603"
C88 "Capacitor 47nF +/-20% 50V 0402" CAPC0402(1005)60_L 847.04,2644.47 r180 top value="10nF 0402"
C89 "Capacitor 1µF +/-0.1% 25V 0603" CAPC0603(1608)100_L 1400.76,2463.09 r90 top value="100nF 0603"
C90 "Capacitor 1µF +/-0.1% 25V 0603" CAPC0603(1608)100_L 1545.76,2463.09 r270 top value="4u7F 0603"
C91 "Capacitor 1µF +/-0.1% 25V 0603" CAPC0603(1608)100_L 1026.76,2963.09 r180 top value="1uF 0603"
C92 "Capacitor 1µF +/-0.1% 25V 0603" CAPC0603(1608)100_L 946.76,2928.09 r270 top value="100nF 0603"
C93 "Capacitor 1µF +/-0.1% 25V 0603" CAPC0603(1608)100_L 696.76,2516.09 r0 top value="1uF 0603"
C94 "Capacitor 1µF +/-0.1% 25V 0603" CAPC0603(1608)100_L 696.76,2466.09 r0 top value="1uF 0603"
C95 "Capacitor 1µF +/-0.1% 25V 0603" CAPC0603(1608)100_L 1188.31,2458.09 r180 top value="100nF 0603"
C96 "Capacitor 1µF +/-0.1% 25V 0603" CAPC0603(1608)100_L 1188.31,2458.09 r0 bottom value="1uF 0603"
C97 "Capacitor 1µF +/-0.1% 25V 0603" CAPC0603(1608)100_L 616.76,2286.09 r270 top value="4u7F 0603"
C98 "Capacitor 1µF +/-0.1% 25V 0603" CAPC0603(1608)100_L 756.76,2283.65 r90 top value="4u7F 0603"
C99 "Capacitor 1µF +/-0.1% 25V 0603" CAPC0603(1608)100_L 1495.76,2305.65 r270 bottom value="4u7F 0603"
C100 "Capacitor 1µF +/-0.1% 25V 0603" CAPC0603(1608)100_L 1350.75,2305.53 r90 bottom value="4u7F 0603"
C101 "Capacitor 1µF +/-0.1% 25V 0603" CAPC0603(1608)100_L 2376.76,1688.16 r180 top value="100nF 0603"
C102 "Capacitor 1µF +/-0.1% 25V 0603" CAPC0603(1608)100_L 1596.76,1543.53 r90 top value="100nF 0603"
C103 "Capacitor 1µF +/-0.1% 25V 0603" CAPC0603(1608)100_L 2244.31,1436.09 r180 top value="100nF 0603"
C104 "Capacitor 1µF +/-0.1% 25V 0603" CAPC0603(1608)100_L 2374.31,1756.09 r180 top value="100nF 0603"
C105 "Capacitor 1µF +/-0.1% 25V 0603" CAPC0603(1608)100_L 2223.45,2204.2 r180 top value="100nF 0603"
C106 "Capacitor 1µF +/-0.1% 25V 0603" CAPC0603(1608)100_L 2376.76,1936.09 r180 top value="100nF 0603"
C107 "Capacitor 1µF +/-0.1% 25V 0603" CAPC0603(1608)100_L 1684.2,2196.09 r0 top value="100nF 0603"
C108 "Capacitor 1µF +/-0.1% 25V 0603" CAPC0603(1608)100_L 2351.75,2013.65 r270 top value="100nF 0603"
C109 "Capacitor 1µF +/-0.1% 25V 0603" CAPC0603(1608)100_L 2401.68,2013.33 r270 top value="100nF 0603"
C110 "Capacitor 1µF +/-0.1% 25V 0603" CAPC0603(1608)100_L 2451.75,2013.65 r270 top value="1uF 0603"
C111 "Capacitor 1µF +/-0.1% 25V 0603" CAPC0603(1608)100_L 2501.75,2013.65 r270 top value="1uF 0603"
C112 "Capacitor 1µF +/-0.1% 25V 0603" CAPC0603(1608)100_L 1598.48,2133.47 r0 top value="4u7F 0603"
C113 "Capacitor 1µF +/-0.1% 25V 0603" CAPC0603(1608)100_L 1536.76,1543.65 r90 top value="4u7F 0603"
C114 "Capacitor 1µF +/-0.1% 25V 0603" CAPC0603(1608)100_L 3226.76,1621.09 r270 top value="2u2F 0603"
C115 "Capacitor 1µF +/-0.1% 25V 0603" CAPC0603(1608)100_L 3171.76,1621.09 r270 top value="2u2F 0603"
C116 "Capacitor 1µF +/-0.1% 25V 0603" CAPC0603(1608)100_L 3116.76,1621.09 r90 top value="100nF 0603"
C117 "Capacitor 1µF +/-0.1% 25V 0603" CAPC0603(1608)100_L 3061.76,1621.09 r90 top value="100nF 0603"
C118 "Capacitor 1µF +/-0.1% 25V 0603" CAPC0603(1608)100_L 1574.2,1621.09 r0 top value="2u2F 0603"
C119 "Capacitor 1µF +/-0.1% 25V 0603" CAPC0603(1608)100_L 1346.76,1436.09 r0 top value="100nF 0603"
C120 "Capacitor 1µF +/-0.1% 25V 0603" CAPC0603(1608)100_L 2379.31,1836.09 r180 top value="100nF 0603"
C121 "Capacitor 1µF +/-0.1% 25V 0603" CAPC0603(1608)100_L 1771.76,2221.09 r90 top value="2u2F 0603"
C122 "Capacitor 47nF +/-20% 50V 0402" CAPC0402(1005)60_L 2764.47,1701.09 r180 top value="10nF 0402"
C123 "Capacitor 1µF +/-0.1% 25V 0603" CAPC0603(1608)100_L 2956.76,1811.09 r270 top value="100nF 0603"
C124 "Capacitor 3pF 0402" CAPC0402(1005)60_L 2871.76,1646.09 r180 top value="22nF 0402"
C125 "TAJB106K016RNJ" AVX-TAJ-B-2_N 2875.9,625.47 r0 bottom value="10µF 1210"
C126 "TAJB106K016RNJ" AVX-TAJ-B-2_N 1258.29,641.28 r90 top value="10µF 1210"
C127 "TAJB106K016RNJ" AVX-TAJ-B-2_N 1423.29,641.28 r90 top value="4µ7F 1210"
C128 "Capacitor 1µF +/-0.1% 25V 0603" CAPC0603(1608)100_L 1468.29,402.15 r90 top value="100nF 0603"
C129 "10uF 1210" CAPC3225X279N 1622.82,696.21 r270 top
C130 "10uF 1210" CAPC3225X279N 1902.82,696.21 r270 top
C131 "10uF 1210" CAPC3225X279N 2042.82,696.21 r270 top
C132 "10uF 1210" CAPC3225X279N 1762.82,696.21 r270 top
C133 "Capacitor 1µF +/-0.1% 25V 0603" CAPC0603(1608)100_L 4189.04,789.47 r90 top value="10nF 0603"
C134 "Capacitor 10 uF +/- 10% 16 V 1206" CAPC3216X180X50NL20T25 4269.04,739.47 r90 top value="4u7F 1206"
C135 "Capacitor 1µF +/-0.1% 25V 0603" CAPC0603(1608)100_L 878.29,664.71 r90 top value="10nF 0603"
C136 "Capacitor 10 uF +/- 10% 16 V 1206" CAPC3216X180X50NL20T25 788.29,687.27 r270 top value="4u7F 1206"
C137 "Capacitor 10 uF +/- 10% 16 V 1206" CAPC3216X180X50NL20T25 4149.04,587.47 r180 top value="4u7F 1206"
C138 "Capacitor 10 uF +/- 10% 16 V 1206" CAPC3216X180X50NL20T25 1123.29,717.27 r270 top value="4u7F 1206"
C139 "Capacitor 1µF +/-0.1% 25V 0603" CAPC0603(1608)100_L 1288.29,232.15 r270 top value="15nF 0603"
C140 "2u2F 1210" CAPC3225X279N 1168.29,322.15 r90 top
C141 "Capacitor 1µF +/-0.1% 25V 0603" CAPC0603(1608)100_L 4103.37,358.92 r180 top value="10nF 0603"
C142 "Capacitor 10 uF +/- 10% 16 V 1206" CAPC3216X180X50NL20T25 4144.16,439.47 r180 top value="4u7F 1206"
C143 "Capacitor 1µF +/-0.1% 25V 0603" CAPC0603(1608)100_L 578.29,699.71 r90 top value="10nF 0603"
C144 "Capacitor 10 uF +/- 10% 16 V 1206" CAPC3216X180X50NL20T25 658.29,742.15 r270 top value="4u7F 1206"
C145 "Capacitor 10 uF +/- 10% 16 V 1206" CAPC3216X180X50NL20T25 4148.41,122.15 r180 top value="4u7F 1206"
C146 "Capacitor 10 uF +/- 10% 16 V 1206" CAPC3216X180X50NL20T25 343.29,662.27 r90 top value="4u7F 1206"
C147 "TAJB106K016RNJ" AVX-TAJ-B-2_N 3213.29,607.15 r90 top value="4µ7F 1210"
C148 "Capacitor 1µF +/-0.1% 25V 0603" CAPC0603(1608)100_L 3353.29,379.59 r90 top value="100nF 0603"
C149 "10uF 1210" CAPC3225X279N 3579.04,689.47 r270 top
C150 "10uF 1210" CAPC3225X279N 3819.04,689.47 r270 top
C151 "Capacitor 1µF +/-0.1% 25V 0603" CAPC0603(1608)100_L 3163.29,229.59 r270 top value="15nF 0603"
C152 "2u2F 1210" CAPC3225X279N 3043.29,307.15 r90 top
C153 "10uF 1210" CAPC3225X279N 2896.68,775.06 r90 top
C154 "Capacitor 10 uF +/- 10% 16 V 1206" CAPC3216X180X50NL20T25 2768.04,780.47 r90 top value="4u7F 1206"
C155 "Capacitor 10 uF +/- 10% 16 V 1206" CAPC3216X180X50NL20T25 2463.61,869.55 r270 top value="4u7F 1206"
C156 "10uF 1210" CAPC3225X279N 2323.29,822.15 r90 top
C157 "10uF 1210" CAPC3225X279N 2178.29,822.15 r90 top
C158 "Capacitor 1µF +/-0.1% 25V 0603" CAPC0603(1608)100_L 2463.61,743.57 r0 top value="1nF 0603"
C159 "TAJB106K016RNJ" AVX-TAJ-B-2_N 523.29,522.15 r0 top value="4µ7F 1210"
C160 "10uF 1210" CAPC3225X279N 718.29,207.15 r180 top
C161 "Capacitor 10 uF +/- 10% 16 V 1206" CAPC3216X180X50NL20T25 3068.3,856.43 r270 top value="4u7F 1206"
C162 "Capacitor 10 uF +/- 10% 16 V 1206" CAPC3216X180X50NL20T25 3349.59,849.13 r270 top value="4u7F 1206"
C163 "10uF 1210" CAPC3225X279N 3451.79,747.39 r90 top
C164 "Capacitor 10 uF +/- 10% 16 V 1206" CAPC3216X180X50NL20T25 2296.24,211.91 r0 top value="4u7F 1206"
C165 "Capacitor 10 uF +/- 10% 16 V 1206" CAPC3216X180X50NL20T25 2296.24,521.91 r180 top value="4u7F 1206"
C166 "Capacitor 1µF +/-0.1% 25V 0603" CAPC0603(1608)100_L 3244.94,924.41 r0 top value="1nF 0603"
C167 "Capacitor 1µF +/-0.1% 25V 0603" CAPC0603(1608)100_L 618.29,362.15 r90 top value="100nF 0603"
C168 "Capacitor 1µF +/-0.1% 25V 0603" CAPC0603(1608)100_L 253.29,404.71 r90 top value="15nF 0603"
C169 "2u2F 1210" CAPC3225X279N 343.29,252.15 r90 top
C170 "Capacitor 1µF +/-0.1% 25V 0603" CAPC0603(1608)100_L 736.76,1426.09 r90 top value="2u2F 0603"
C171 "Capacitor 1µF +/-0.1% 25V 0603" CAPC0603(1608)100_L 786.76,1426.09 r270 top value="100nF 0603"
C172 "Capacitor 1µF +/-0.1% 25V 0603" CAPC0603(1608)100_L 571.76,1221.09 r270 bottom value="2u2F 0603"
C173 "Capacitor 1µF +/-0.1% 25V 0603" CAPC0603(1608)100_L 516.76,1221.09 r90 bottom value="100nF 0603"
C174 "Capacitor 1µF +/-0.1% 25V 0603" CAPC0603(1608)100_L 901.76,1336.09 r180 top value="1uF 0603"
C175 "Capacitor 1µF +/-0.1% 25V 0603" CAPC0603(1608)100_L 901.76,1281.09 r180 top value="100nF 0603"
C176 "Capacitor 1µF +/-0.1% 25V 0603" CAPC0603(1608)100_L 902.04,1390.47 r0 top value="2u2F 0603"
C177 "Capacitor 1µF +/-0.1% 25V 0603" CAPC0603(1608)100_L 901.76,1231.09 r180 top value="100nF 0603"
C178 "Capacitor 1µF +/-0.1% 25V 0603" CAPC0603(1608)100_L 544.2,1291.09 r0 bottom value="1uF 0603"
C179 "Capacitor 1µF +/-0.1% 25V 0603" CAPC0603(1608)100_L 544.31,1281.09 r0 top value="100nF 0603"
C180 "Capacitor 1µF +/-0.1% 25V 0603" CAPC0603(1608)100_L 197.47,1285.53 r180 bottom value="2u2F 0603"
C181 "Capacitor 1µF +/-0.1% 25V 0603" CAPC0603(1608)100_L 871.76,1501.09 r90 top value="100nF 0603"
FB1 "742792625" FB-0603 4193.37,1796.09 r0 top
FB2 "742792662" FB-0603 4071.19,1330.69 r270 top
FB3 "BLM18PG181SN1D" FB-0603 4487.04,2893.47 r90 bottom
FB4 "BLM18PG181SN1D" FB-0603 4130.76,2902.47 r90 top
FB5 "742792625" FB-0603 4339.32,2621.42 r270 top
FB6 "742792662" FB-0603 3621.09,2404.04 r270 top
FB7 "742792662" FB-0603 1475.76,2458.09 r270 top
FB8 "742792662" FB-0603 686.76,2276.09 r90 top
FB9 "742792662" FB-0603 1420.76,2296.47 r90 bottom
FB10 "742863122" FB-0603 2571.76,2017.7 r270 top
FB11 "742863122" FB-0603 3201.76,1721.09 r180 top
FB12 "742863122" FB-0603 3026.76,1817.7 r270 top
FB13 "742863122" FB-0603 946.76,1506.09 r90 top
FL1 "DEA165550BT-2230C2-H" DEA165550BT-2230C2-H 4051.76,1551.09 r0 top
FL2 "DEA165550BT-2230C2-H" DEA165550BT-2230C2-H 4054.16,2995.54 r220 top
IC1 "QPA9501TR13" QPA9501TR13 4288.32,1548.76 r0 top
IC2 "SCN-2-65+" SCN-2-65+ 3810.73,1605.73 r180 top
IC3 "HMC431LP4E" QFN50P400X400X100-25N 3801.6,1821.8 r270 top
IC4 "ADF4158" QFN50P400X400X80-25N-D 3799.42,1315.53 r270 top
IC5 "TRF37A73IDSGR" SON50P200X200X80-9N 4360.04,3032.47 r180 top
IC6 "SKY65404-31" SON50P150X150X50-7N-D 4563.22,3007.09 r180 top
IC7 "ADL5801ACPZ" QFN50P400X400X100-25N-D 4002.91,2609.32 r90 top
IC8 "5400BL15B0050001E" 5400BL15B0050001E 4002.76,2881.09 r270 top
IC9 "5400BL15B0050001E" 5400BL15B0050001E 4004.55,2321.49 r90 top
IC10 "THS4561IDGKT" SOP65P490X110-8N 2816.64,2833.53 r270 top
IC11 "THS4561IDGKT" SOP65P490X110-8N 2206.64,2828.53 r270 top
IC12 "LTC1420IGN#PBF" SOP64P601X175-28N 968.79,2393.35 r0 top
IC13 "INA849DR" SOIC127P600X175-8N 1126.76,2823.09 r180 top
IC14 "74AHCT2G125DP,125" SOP65P400X110-8N 1315.76,2593.09 r270 top
IC15 "STM32F4" QFP50P1600X1600X160-100N 1976.76,1816.09 r180 top
IC16 "LMK1C1102PWR" SOP65P640X120-8N 1391.76,1621.09 r270 top
IC17 "LMK1C1102PWR" SOP65P640X120-8N 2936.76,1481.09 r0 top
IC18 "SN74LVC1G04DRYR" TPS3420DDRYR 2871.76,1592.9 r270 top
IC19 "MAX17632CATE+" QFN50P300X300X80-17N 1348.76,409.24 r0 top
IC20 "MAX38902AATA+T" SON50P200X200X80-9N-D 4111.47,713.41 r90 top
IC21 "MAX38902AATA+T" SON50P200X200X80-9N-D 991.16,672.7 r180 top
IC22 "MAX38902AATA+T" SON50P200X200X80-9N-D 4108.29,252.15 r90 top
IC23 "MAX38902AATA+T" SON50P200X200X80-9N-D 472.66,702.31 r0 top
IC24 "MAX17630CATE+" QFN50P300X300X80-17N 3218.76,385.06 r0 top
IC25 "ADM7172ACPZ-5.0-R7" SON50P300X300X80-9N-D 2617.15,786.87 r0 top
IC26 "ADM7170ACPZ-5.0-R7" SON50P300X300X80-9N-D 3208.84,826.81 r180 top
IC27 "ADP7182AUJZ-5.0-R7" SOT95P280X100-5N 2313.96,366.13 r90 top
IC28 "MAX17579ATC+" SON50P300X300X80-13N 498.29,352.15 r0 top
IC29 "USB3317C-CP-TR" QFN50P400X400X100-25N-D 726.28,1254.32 r0 top
J1 "60312202114514" 60312202114514 4738.33,1550.93 r90 top locked
J2 "60312202114514" 60312202114514 4740.7,3025.33 r90 top locked
J3 "PZ254V-11-04P" HDRV4W64P0X254_1X4_1016X250X890P 2838.04,2315.47 r180 top
J4 "HTSW-103-07-G-D" HDRV6W64P254_2X3_762X508X838P 173.05,1653.02 r0 top
J5 "694106301002" 694106301002 2648.64,345.93 r270 top
J6 "USB4940-00-A" USB494000A 169.66,1193.68 r270 top
L1 "0.6nH" LQP03HQ0N5B02D 4480.85,2968.47 r180 top
L2 "LQW15AN9N9J80D" LQW15AN10NG80D 4264.04,3002.59 r270 top
L3 "7u8H" INDPM135129X640N 1846.91,342.15 r0 top
L4 "4u7H" INDPM135129X640N 3706.91,342.15 r0 top
L5 "6u8H" SPM7054VC6R8MD 833.29,437.15 r0 top
LED1 "LTST-C171KRKT" LEDM2012X90N 1422.98,852.15 r180 top
P1 "X4C60J1-20G" X4C60J1-20G 4512.88,1574.98 r90 top
R1 "383KR2F" RESC0402(1005)_L 4203.44,1723.45 r0 top value="27R 0402"
R2 "383KR2F" RESC0402(1005)_L 4341.16,1403.45 r270 top value="2R 0402"
R3 "383KR2F" RESC0402(1005)_L 4406.16,1698.45 r90 top value="2R 0402"
R4 "383KR2F" RESC0402(1005)_L 4579.47,1631.09 r180 top value="49R9 0402"
R5 "383KR2F" RESC0402(1005)_L 4381.16,1403.45 r270 top value="27K4 0402"
R6 "383KR2F" RESC0402(1005)_L 3662.04,1856.47 r90 top value="45R3 0402"
R7 "120R3J" RESC0603(1608)_L 3971.19,1930.69 r180 top value="200R 0603"
R8 "383KR2F" RESC0402(1005)_L 3946.19,1373.4 r90 top value="5K1 0402"
R9 "120R3J" RESC0603(1608)_L 3971.19,2035.69 r180 top value="100R 0603"
R10 "383KR2F" RESC0402(1005)_L 3621.04,1856.76 r90 top value="27R 0402"
R11 "120R3J" RESC0603(1608)_L 4561.04,2934.47 r0 top value="100R 0603"
R12 "383KR2F" RESC0402(1005)_L 3842.04,2586.47 r270 top value="49R9 0402"
R13 "383KR2F" RESC0402(1005)_L 3842.76,2678.8 r90 top value="49R9 0402"
R14 "120R3J" RESC0603(1608)_L 4262.04,2630.03 r90 top value="665R 0603"
R15 "120R3J" RESC0603(1608)_L 2821.64,2608.53 r0 top value="8K2 0603"
R16 "120R3J" RESC0603(1608)_L 2214.2,2608.53 r0 top value="1K6 0603"
R17 "120R3J" RESC0603(1608)_L 3202.04,2745.47 r0 top value="3K6 0603"
R18 "120R3J" RESC0603(1608)_L 2974.2,2748.53 r0 top value="2K4 0603"
R19 "120R3J" RESC0603(1608)_L 2661.64,2743.53 r0 top value="680R 0603"
R20 "120R3J" RESC0603(1608)_L 2441.64,2738.53 r0 top value="470R 0603"
R21 "120R3J" RESC0603(1608)_L 3340.04,2837.47 r90 top value="360R 0603"
R22 "120R3J" RESC0603(1608)_L 3206.04,2918.47 r0 top value="3K6 0603"
R23 "120R3J" RESC0603(1608)_L 2971.64,2918.53 r0 top value="2K4 0603"
R24 "120R3J" RESC0603(1608)_L 2659.08,2918.53 r0 top value="680R 0603"
R25 "120R3J" RESC0603(1608)_L 2441.64,2918.53 r0 top value="470R 0603"
R26 "120R3J" RESC0603(1608)_L 2821.64,3058.53 r0 top value="8K2 0603"
R27 "120R3J" RESC0603(1608)_L 2206.64,3043.53 r0 top value="1K6 0603"
R28 "383KR2F" RESC0402(1005)_L 1680.14,2893.17 r270 top value="49R9 0402"
R29 "383KR2F" RESC0402(1005)_L 1659.24,2824.47 r0 top value="49R9 0402"
R30 "120R3J" RESC0603(1608)_L 861.76,2718.09 r270 top value="27R 0603"
R31 "383KR2F" RESC0402(1005)_L 1680.14,2757.35 r90 top value="49R9 0402"
R32 "120R3J" RESC0603(1608)_L 1316.76,2820.65 r90 top value="1K5 0603"
R33 "383KR2F" RESC0402(1005)_L 766.76,2476.09 r90 top value="0R 0402"
R34 "383KR2F" RESC0402(1005)_L 936.76,2461.09 r90 bottom value="0R 0402"
R35 "120R3J" RESC0603(1608)_L 2073.04,1408.91 r90 top value="40K 0603"
R36 "120R3J" RESC0603(1608)_L 2024.04,1408.91 r90 top value="40K 0603"
R37 "120R3J" RESC0603(1608)_L 1290.38,849.87 r180 top value="1K 0603"
R38 "120R3J" RESC0603(1608)_L 2776.76,1646.09 r180 top value="470K 0603"
R39 "120R3J" RESC0603(1608)_L 2776.76,1589.42 r0 top value="470K 0603"
R40 "120R3J" RESC0603(1608)_L 2013.76,2219.81 r90 top value="40K 0603"
R41 "120R3J" RESC0603(1608)_L 1904.05,2219.81 r90 top value="40K 0603"
R42 "120R3J" RESC0603(1608)_L 1408.29,232.15 r270 top value="75K 0603"
R43 "120R3J" RESC0603(1608)_L 1109.27,464.04 r90 top value="3M3 0603"
R44 "120R3J" RESC0603(1608)_L 1348.29,232.15 r90 top value="13K7 0603"
R45 "120R3J" RESC0603(1608)_L 1199.83,464.04 r270 top value="511K 0603"
R46 "120R3J" RESC0603(1608)_L 1468.29,232.15 r90 top value="33K2 0603"
R47 "120R3J" RESC0603(1608)_L 3293.29,227.15 r90 top value="75K 0603"
R48 "120R3J" RESC0603(1608)_L 3008.29,442.15 r90 top value="3M3 0603"
R49 "120R3J" RESC0603(1608)_L 3228.29,227.15 r90 top value="21K 0603"
R50 "120R3J" RESC0603(1608)_L 3073.29,442.15 r270 top value="511K 0603"
R51 "120R3J" RESC0603(1608)_L 3363.29,227.15 r90 top value="19K6 0603"
R52 "120R3J" RESC0603(1608)_L 373.29,404.71 r90 top value="3M3 0603"
R53 "120R3J" RESC0603(1608)_L 583.29,222.15 r270 top value="8K06 0603"
R54 "120R3J" RESC0603(1608)_L 318.29,404.59 r270 top value="511K 0603"
R55 "120R3J" RESC0603(1608)_L 443.29,222.15 r90 top value="43K2 0603"
R56 "120R3J" RESC0603(1608)_L 513.29,222.15 r90 top value="44K2 0603"
R57 "120R3J" RESC0603(1608)_L 546.76,1331.09 r180 top value="10K 0603"
R58 "120R3J" RESC0603(1608)_L 777.04,1080.47 r90 top value="39R 0603"
R59 "120R3J" RESC0603(1608)_L 606.76,1386.09 r0 top value="8K06 0603"
R60 "383KR2F" RESC0402(1005)_L 210.18,1239.53 r0 bottom value="5K1 0402"
R61 "383KR2F" RESC0402(1005)_L 375.47,1106.53 r90 top value="5K1 0402"
S1 "SS3NP-MS-V-T_R" SS3NPMSVTR 302.19,2074.28 r180 top
S2 "SS3NP-MS-V-T_R" SS3NPMSVTR 306.12,2440.42 r180 top
S3 "SS3NP-MS-V-T_R" SS3NPMSVTR 303.25,2792.15 r180 top
Y1 "TG2520SMN 20MHz" TG2520SMN200000MECGNNM3 2869.2,1737.43 r270 top
Y2 "ECS-3225MVLC-260-CN-TR" OSC_ECS-3225MVLC-260-CN-TR 741.48,1563.69 r180 top

## Footprints (in the part's own frame and the unit in brackets; to place one, negate y for a bottom-side part, rotate by r counter-clockwise, add the part's x,y. Pads: shape width x height; smd on the part's side, far side on the other; paste and mask are expansions set on the pad)
5400BL15B0050001E [mm]
  rect 0.41x0.33 smd: 1(-0.66,-0.495) 2(0,-0.495) 3(0.66,-0.495) 4(0.66,0.495) 5(0,0.495) 6(-0.66,0.495)
  silkscreen extent -1.09,-0.95 -0.99,-0.85, body extent -1.02,-0.64 1.02,0.64, height 0.58
694106301002 [mm]
  oval 2.3x4.7 hole 1 slot 3.3 at 90 deg: 1(-5.8,0)
  oval 2.2x4.5 hole 1 slot 3 at 90 deg: 2(0,0)
  oval 4.5x2.2 hole 1 slot 3 at 0 deg: 3(-2.8,4.8)
  silkscreen extent -6.6,-4.5 7.9,5.1, body extent -6.8,-4.5 7.7,5, height 11.35
60312202114514 [mm]
  rect 0.61x1.97 smd: 1(0,0.985)
  rect 1.4x5 smd: 2(-4.25,2.5) 3(4.25,2.5)
  rect 1.4x5 smd far side: 4(-4.25,2.5) 5(4.25,2.5)
ATTN_TFA16C06DBER [mm]
  rect 0.8x0.5 smd paste+0 mask+0.09: 1(0.6,0.4) 2(-0.6,0.4)
  rect 2x0.5 smd paste+0 mask+0.09: G(0,-0.4)
  silkscreen extent 0.63,0.94 0.83,1.13
AVX-TAJ-A-2_L [mm] "Molded Capacitor, 2-Leads, Body 3.4x1.8mm, IPC High Density"
  rect 1.55x1.2 smd: 1(-1.1,0) 2(1.1,0)
  silkscreen extent -2.37,-0.9 1.7,0.9, body extent -1.92,-0.9 1.92,0.9, height 1.8
AVX-TAJ-B-2_N [mm] "Molded Capacitor, 2-Leads, Body 3.7x3mm, IPC Medium Density"
  rect 1.95x2.3 smd: 1(-1.375,0) 2(1.375,0)
  silkscreen extent -2.85,-1.5 1.85,1.5, body extent -2.07,-1.5 2.07,1.5, height 2.1
CAPC0402(1005)60_L [mm] "Chip Capacitor, Body 1.0x0.5mm, Height 0.6mm, IPC High Density"
  rrect25% 0.5x0.55 smd: 1(-0.45,0) 2(0.45,0)
  silkscreen extent 0,-0.2 0,0.2, body extent -0.5,-0.25 0.5,0.25, height 0.6
CAPC0603(1608)100_L [mm] "Chip Capacitor, Body 1.6x0.8mm, Height 1.0mm, IPC High Density"
  rrect25% 0.66x0.76 smd: 1(-0.7,0) 2(0.7,0)
  silkscreen extent 0,-0.3 0,0.3, body extent -0.8,-0.4 0.8,0.4, height 0.95
CAPC3216X180X50NL20T25 [mm] "Chip Capacitor, 2-Leads, Body 3.40x1.80mm, IPC Medium Density"
  rect 1.3x1.8 smd: 1(-1.4,0) 2(1.4,0)
  silkscreen extent -0.35,-0.8 0.35,0.8, body extent -1.7,-0.9 1.7,0.9, height 1.8
CAPC3225X279N [mil]
  rect 36x106 smd: 1(-55,0) 2(55,0)
  silkscreen extent -24,-53 24,53, body extent -63,-49 63,49, height 110
DEA165550BT-2230C2-H [mm]
  rect 0.25x0.55 smd: 1(-0.555,0) 3(0.555,0)
  rect 0.4x0.6 smd: 2(0,0)
  silkscreen extent -1.1,-0.05 -1,0.05, body extent -0.8,-0.4 0.8,0.4, height 0.65
FB-0603 [mil]
  rect 43.55x37.73 smd paste+0 mask+0: 1(-26.62,0) 2(26.62,0)
  silkscreen extent -48,-35 48,35, body extent -58,-29 58,29, height 10
HDRV4W64P0X254_1X4_1016X250X890P [mm]
  rect 1.65x1.65 hole 1.1: 1(0,0)
  round 1.65 hole 1.1: 2(2.54,0) 3(5.08,0) 4(7.62,0)
  silkscreen extent -1.47,-1.33 9.09,1.33, body extent -1.27,-1.25 8.89,1.25, height 8.9
HDRV6W64P254_2X3_762X508X838P [mm]
  rect 1.65x1.65 hole 1.1: 1(0,0)
  round 1.65 hole 1.1: 2(0,2.54) 3(2.54,0) 4(2.54,2.54) 5(5.08,0) 6(5.08,2.54)
  silkscreen extent -1.27,-1.27 6.35,3.81, body extent -1.27,-1.27 6.35,3.81, height 8.38
INDPM135129X640N [mm]
  rect 3.25x10.2 smd: 1(-5.75,0) 2(5.75,0)
  silkscreen extent -6.73,-6.45 6.73,6.45, body extent -6.68,-6.43 6.68,6.43, height 6.29
LEDM2012X90N [mm]
  rect 1.25x1.1 smd: 1(-0.95,0) 2(0.95,0)
  silkscreen extent -1.44,-0.8 1.06,0.78, body extent -0.9,-0.67 1.1,0.58, height 1.16
LQP03HQ0N5B02D [mm]
  rect 0.3x0.3 smd: 1(-0.3,0) 2(0.3,0)
  silkscreen extent -0.73,-0.03 -0.63,0.07, body extent -0.3,-0.15 0.3,0.15, height 0.42
LQW15AN10NG80D [mm]
  rect 0.41x0.66 smd: 1(-0.505,0) 2(0.505,0)
  silkscreen extent 0,-0.3 0,0.3, body extent -0.5,-0.25 0.5,0.25, height 0.6
OSC_ECS-3225MVLC-260-CN-TR [mm]
  rect 1.3x1.1 smd paste+0 mask+0.102: 1(-1.15,-0.95) 2(1.15,-0.95) 3(1.15,0.95) 4(-1.15,0.95)
  silkscreen extent -2.37,-1.25 0.25,1.25, body extent -1.6,-1.25 1.6,1.25, height 1.2
QFN50P300X300X80-17N [mm]
  rect 0.85x0.3 smd: 1(-1.45,0.75) 2(-1.45,0.25) 3(-1.45,-0.25) 4(-1.45,-0.75) 9(1.45,-0.75) 10(1.45,-0.25) 11(1.45,0.25) 12(1.45,0.75)
  rect 0.3x0.85 smd: 5(-0.75,-1.45) 6(-0.25,-1.45) 7(0.25,-1.45) 8(0.75,-1.45) 13(0.75,1.45) 14(0.25,1.45) 15(-0.25,1.45) 16(-0.75,1.45)
  rect 1.7x1.7 smd: 17(0,0)
  silkscreen extent -2,1.38 -1.75,1.62, body extent -1.55,-1.55 1.55,1.55, height 0.8
QFN50P400X400X80-25N-D [mm]
  rect 0.85x0.3 smd: 1(-1.95,1.25) 2(-1.95,0.75) 3(-1.95,0.25) 4(-1.95,-0.25) 5(-1.95,-0.75) 6(-1.95,-1.25) 13(1.95,-1.25) 14(1.95,-0.75) 15(1.95,-0.25) 16(1.95,0.25) 17(1.95,0.75) 18(1.95,1.25)
  rect 0.3x0.85 smd: 7(-1.25,-1.95) 8(-0.75,-1.95) 9(-0.25,-1.95) 10(0.25,-1.95) 11(0.75,-1.95) 12(1.25,-1.95) 19(1.25,1.95) 20(0.75,1.95) 21(0.25,1.95) 22(-0.25,1.95) 23(-0.75,1.95) 24(-1.25,1.95)
  rect 2.65x2.65 smd: 25(0,0)
  silkscreen extent -2.5,1.88 -2.25,2.13, body extent -2.05,-2.05 2.05,2.05, height 0.8
QFN50P400X400X100-25N [mm]
  rect 0.7x0.3 smd: 1(-2.05,1.25) 2(-2.05,0.75) 3(-2.05,0.25) 4(-2.05,-0.25) 5(-2.05,-0.75) 6(-2.05,-1.25) 13(2.05,-1.25) 14(2.05,-0.75) 15(2.05,-0.25) 16(2.05,0.25) 17(2.05,0.75) 18(2.05,1.25)
  rect 0.3x0.7 smd: 7(-1.25,-2.05) 8(-0.75,-2.05) 9(-0.25,-2.05) 10(0.25,-2.05) 11(0.75,-2.05) 12(1.25,-2.05) 19(1.25,2.05) 20(0.75,2.05) 21(0.25,2.05) 22(-0.25,2.05) 23(-0.75,2.05) 24(-1.25,2.05)
  rect 2.95x2.95 smd: 25(0,0)
  silkscreen extent -2.52,1.88 -2.28,2.13, body extent -2.05,-2.05 2.05,2.05, height 1
QFN50P400X400X100-25N-D [mm]
  rect 0.85x0.3 smd: 1(-1.95,1.25) 2(-1.95,0.75) 3(-1.95,0.25) 4(-1.95,-0.25) 5(-1.95,-0.75) 6(-1.95,-1.25) 13(1.95,-1.25) 14(1.95,-0.75) 15(1.95,-0.25) 16(1.95,0.25) 17(1.95,0.75) 18(1.95,1.25)
  rect 0.3x0.85 smd: 7(-1.25,-1.95) 8(-0.75,-1.95) 9(-0.25,-1.95) 10(0.25,-1.95) 11(0.75,-1.95) 12(1.25,-1.95) 19(1.25,1.95) 20(0.75,1.95) 21(0.25,1.95) 22(-0.25,1.95) 23(-0.75,1.95) 24(-1.25,1.95)
  rect 2.65x2.65 smd: 25(0,0)
  silkscreen extent -2.5,1.88 -2.25,2.12, body extent -2.05,-2.05 2.05,2.05, height 1
QFP50P1600X1600X160-100N [mm]
  rect 1.475x0.3 smd: 1(-7.738,6) 2(-7.738,5.5) 3(-7.738,5) 4(-7.738,4.5) 5(-7.738,4) 6(-7.738,3.5) 7(-7.738,3) 8(-7.738,2.5) 9(-7.738,2) 10(-7.738,1.5) 11(-7.738,1) 12(-7.738,0.5) 13(-7.738,0) 14(-7.738,-0.5) 15(-7.738,-1) 16(-7.738,-1.5) 17(-7.738,-2) 18(-7.738,-2.5) 19(-7.738,-3) 20(-7.738,-3.5) 21(-7.738,-4) 22(-7.738,-4.5) 23(-7.738,-5) 24(-7.738,-5.5) 25(-7.738,-6) 51(7.738,-6) 52(7.738,-5.5) 53(7.738,-5) 54(7.738,-4.5) 55(7.738,-4) 56(7.738,-3.5) 57(7.738,-3) 58(7.738,-2.5) 59(7.738,-2) 60(7.738,-1.5) 61(7.738,-1) 62(7.738,-0.5) 63(7.738,0) 64(7.738,0.5) 65(7.738,1) 66(7.738,1.5) 67(7.738,2) 68(7.738,2.5) 69(7.738,3) 70(7.738,3.5) 71(7.738,4) 72(7.738,4.5) 73(7.738,5) 74(7.738,5.5) 75(7.738,6)
  rect 0.3x1.475 smd: 26(-6,-7.738) 27(-5.5,-7.738) 28(-5,-7.738) 29(-4.5,-7.738) 30(-4,-7.738) 31(-3.5,-7.738) 32(-3,-7.738) 33(-2.5,-7.738) 34(-2,-7.738) 35(-1.5,-7.738) 36(-1,-7.738) 37(-0.5,-7.738) 38(0,-7.738) 39(0.5,-7.738) 40(1,-7.738) 41(1.5,-7.738) 42(2,-7.738) 43(2.5,-7.738) 44(3,-7.738) 45(3.5,-7.738) 46(4,-7.738) 47(4.5,-7.738) 48(5,-7.738) 49(5.5,-7.738) 50(6,-7.738) 76(6,7.738) 77(5.5,7.738) 78(5,7.738) 79(4.5,7.738) 80(4,7.738) 81(3.5,7.738) 82(3,7.738) 83(2.5,7.738) 84(2,7.738) 85(1.5,7.738) 86(1,7.738) 87(0.5,7.738) 88(0,7.738) 89(-0.5,7.738) 90(-1,7.738) 91(-1.5,7.738) 92(-2,7.738) 93(-2.5,7.738) 94(-3,7.738) 95(-3.5,7.738) 96(-4,7.738) 97(-4.5,7.738) 98(-5,7.738) 99(-5.5,7.738) 100(-6,7.738)
  silkscreen extent -8.35,-6.65 6.65,6.87, body extent -8,-8 8,8, height 1.6
QPA9501TR13 [mm]
  rect 0.8x0.35 smd: 1(-1.85,1) 2(-1.85,0.5) 3(-1.85,0) 4(-1.85,-0.5) 5(-1.85,-1) 11(1.85,-1) 12(1.85,-0.5) 13(1.85,0) 14(1.85,0.5) 15(1.85,1)
  rect 0.35x0.8 smd: 6(-1,-1.85) 7(-0.5,-1.85) 8(0,-1.85) 9(0.5,-1.85) 10(1,-1.85) 16(1,1.85) 17(0.5,1.85) 18(0,1.85) 19(-0.5,1.85) 20(-1,1.85)
  rect 2.5x2.5 smd: 21(0,0)
  silkscreen extent -2.8,-2 2,2, body extent -2,-2 2,2, height 1
RESC0402(1005)_L [mm] "Chip Resistor, Body 1.0x0.5mm, IPC High Density"
  rrect25% 0.5x0.55 smd: 1(-0.45,0) 2(0.45,0)
  silkscreen extent 0,-0.2 0,0.2, body extent -0.5,-0.25 0.5,0.25, height 0.3
RESC0603(1608)_L [mm] "Chip Resistor, Body 1.6x0.8mm, IPC High Density"
  rrect25% 0.66x0.76 smd: 1(-0.7,0) 2(0.7,0)
  silkscreen extent 0,-0.3 0,0.3, body extent -0.8,-0.4 0.8,0.4, height 0.45
SCN-2-65+ [mm]
  rect 0.61x1.07 smd: 1(-0.99,-1.025) 2(0,-1.025) 3(0.99,-1.025) 4(0.99,1.025) 5(0,1.025) 6(-0.99,1.025)
  silkscreen extent -1.6,-2 1.6,0.8, body extent -1.6,-0.8 1.6,0.8, height 1.06
SOIC127P600X175-8N [mm]
  rect 1.525x0.65 smd: 1(-2.712,1.905) 2(-2.712,0.635) 3(-2.712,-0.635) 4(-2.712,-1.905) 5(2.712,-1.905) 6(2.712,-0.635) 7(2.712,0.635) 8(2.712,1.905)
  silkscreen extent -3.47,-2.45 1.6,2.58, body extent -3,-2.45 3,2.45, height 1.75
SON50P150X150X50-7N-D [mm]
  rect 0.55x0.3 smd: 1(-0.85,0.5) 2(-0.85,0) 3(-0.85,-0.5) 4(0.85,-0.5) 5(0.85,0) 6(0.85,0.5)
  rect 0.8x1.3 smd: 7(0,0)
  silkscreen extent -1.13,0.98 -0.88,1.22, body extent -0.8,-0.75 0.8,0.75, height 0.5
SON50P200X200X80-9N [mm]
  rect 0.7x0.3 smd: 1(-1.05,0.75) 2(-1.05,0.25) 3(-1.05,-0.25) 4(-1.05,-0.75) 5(1.05,-0.75) 6(1.05,-0.25) 7(1.05,0.25) 8(1.05,0.75)
  rect 1x1.7 smd: 9(0,0)
  silkscreen extent -1.23,1.18 -0.98,1.42, body extent -1,-1 1,1, height 0.77
SON50P200X200X80-9N-D [mm]
  rect 0.75x0.3 smd: 1(-1,0.75) 2(-1,0.25) 3(-1,-0.25) 4(-1,-0.75) 5(1,-0.75) 6(1,-0.25) 7(1,0.25) 8(1,0.75)
  rect 0.9x1.3 smd: 9(0,0)
  silkscreen extent -1.22,1.17 -0.98,1.42, body extent -1,-1 1,1, height 0.77
SON50P300X300X80-9N-D [mm]
  rect 0.85x0.3 smd: 1(-1.45,0.75) 2(-1.45,0.25) 3(-1.45,-0.25) 4(-1.45,-0.75) 5(1.45,-0.75) 6(1.45,-0.25) 7(1.45,0.25) 8(1.45,0.75)
  rect 1.7x2.54 smd: 9(0,0)
  silkscreen extent -2,1.28 -1.75,1.52, body extent -1.55,-1.5 1.55,1.5, height 0.8
SON50P300X300X80-13N [mm]
  rect 0.8x0.3 smd: 1(-1.5,1.25) 2(-1.5,0.75) 3(-1.5,0.25) 4(-1.5,-0.25) 5(-1.5,-0.75) 6(-1.5,-1.25) 7(1.5,-1.25) 8(1.5,-0.75) 9(1.5,-0.25) 10(1.5,0.25) 11(1.5,0.75) 12(1.5,1.25)
  rect 1.8x2.6 smd: 13(0,0)
  silkscreen extent -1.82,1.78 -1.57,2.02, body extent -1.5,-1.51 1.5,1.51
SOP64P601X175-28N [mm]
  rect 1.526x0.435 smd: 1(-2.712,4.128) 2(-2.712,3.492) 3(-2.712,2.858) 4(-2.712,2.222) 5(-2.712,1.588) 6(-2.712,0.952) 7(-2.712,0.318) 8(-2.712,-0.318) 9(-2.712,-0.952) 10(-2.712,-1.588) 11(-2.712,-2.222) 12(-2.712,-2.858) 13(-2.712,-3.492) 14(-2.712,-4.128) 15(2.712,-4.128) 16(2.712,-3.492) 17(2.712,-2.858) 18(2.712,-2.222) 19(2.712,-1.588) 20(2.712,-0.952) 21(2.712,-0.318) 22(2.712,0.318) 23(2.712,0.952) 24(2.712,1.588) 25(2.712,2.222) 26(2.712,2.858) 27(2.712,3.492) 28(2.712,4.128)
  silkscreen extent -3.47,-4.95 1.6,4.95, body extent -3.1,-4.99 3.1,4.99, height 1.75
SOP65P400X110-8N [mm]
  rect 0.95x0.45 smd: 1(-1.975,0.975) 2(-1.975,0.325) 3(-1.975,-0.325) 4(-1.975,-0.975) 5(1.975,-0.975) 6(1.975,-0.325) 7(1.975,0.325) 8(1.975,0.975)
  silkscreen extent -2.45,-1.5 1.15,1.55, body extent -2.01,-1.5 2.01,1.5, height 0.93
SOP65P490X110-8N [mm]
  rect 1.4x0.45 smd: 1(-2.2,0.975) 2(-2.2,0.325) 3(-2.2,-0.325) 4(-2.2,-0.975) 5(2.2,-0.975) 6(2.2,-0.325) 7(2.2,0.325) 8(2.2,0.975)
  silkscreen extent -2.9,-1.5 1.15,1.55, body extent -2.45,-1.5 2.45,1.5, height 1.1
SOP65P640X120-8N [mm]
  rect 1.475x0.45 smd: 1(-2.938,0.975) 2(-2.938,0.325) 3(-2.938,-0.325) 4(-2.938,-0.975) 5(2.938,-0.975) 6(2.938,-0.325) 7(2.938,0.325) 8(2.938,0.975)
  silkscreen extent -3.67,-1.5 1.85,1.55, body extent -3.21,-1.5 3.21,1.5, height 1.11
SOT95P280X100-5N [mm]
  rect 1.25x0.6 smd: 1(-1.25,0.95) 2(-1.25,0) 3(-1.25,-0.95) 4(1.25,-0.95) 5(1.25,0.95)
  silkscreen extent -1.88,-1.45 0.28,1.5, body extent -1.4,-1.45 1.4,1.45, height 1
SPM7054VC6R8MD [mm]
  rect 2.85x3.3 smd: 1(-2.975,0) 2(2.975,0)
  silkscreen extent -4.75,-3.5 3.75,3.5, body extent -4.12,-3.5 4.12,3.5, height 5.5
SS3NPMSVTR [mm]
  rect 1x1.2 smd: A1(-3,-2) A2(-3,2) B1(-1,-2) C1(1,-2) C2(3,2)
  silkscreen extent -4.43,-3.4 4.43,1, body extent -4.43,-2.35 4.43,2.35, height 5.04
TG2520SMN200000MECGNNM3 [mm]
  rect 0.8x1 smd: 1(-1.05,-0.7) 2(1.05,-0.7) 3(1.05,0.7) 4(-1.05,0.7)
  silkscreen extent -1.8,-0.75 -1.7,-0.65, body extent -1.37,-1.12 1.37,1.12, height 0.9
TPS3420DDRYR [mm]
  rect 0.35x0.2 smd: 1(-0.3,0.5)
  rect 0.3x0.2 smd: 2(-0.3,0) 3(-0.3,-0.5) 4(0.3,-0.5) 5(0.3,0) 6(0.3,0.5)
  silkscreen extent -0.8,0.55 -0.7,0.65, body extent -0.5,-0.72 0.5,0.72, height 0.58
USB494000A [mm]
  rect 0.6x1.05 smd: A1(-3.195,3.725) B1(3.205,3.725)
  rect 0.6x1.1 smd: A4(-2.4,3.702) B4(2.4,3.702)
  rect 0.3x1.15 smd: A5(-1.25,3.678) A6(-0.25,3.678) A7(0.25,3.678) A8(1.25,3.678) B5(1.75,3.678) B6(0.75,3.678) B7(-0.75,3.678) B8(-1.75,3.678)
  round 0 hole 0.63 unplated: MH1(-2.89,2.603) MH2(2.89,2.603)
  rect 2.18x2 smd: S1(-5.11,3.103) S2(5.11,3.103) S3(-5.11,-0.827) S4(5.11,-0.827)
  silkscreen extent -4.47,-3.68 4.47,4.6, body extent -6,-3.65 6,4.25, height 3.56
X4C60J1-20G [mm]
  rect 0.41x0.33 smd: 1(-0.63,-0.47) 2(0.69,-0.47) 3(0.69,0.52) 4(-0.63,0.52)
  rect 0.41x1.321 smd: 5(0.028,0.028)
  silkscreen extent -1.06,-0.92 -0.96,-0.82, body extent -0.99,-0.62 1.05,0.67, height 0.58

## Part data
AT1: library part CMP-379-000000-3, "RF ATTENUATOR0603 RF ATTENUATOR", Mouser Part No=588-TFA16C06DBER, Package=None, Check_prices=https://www.snapeda.com/parts/TFA16C06DBER/Ohmite/view-part/?ref=eda, Component Type=Standard, Design Item ID=TFA16C06DBER, Manufacturer Part No=TFA16C06DBER, MF=Ohmite, Pin Count=3, SnapEDA_Link=https://www.snapeda.com/parts/TFA16C06DBER/Ohmite/view-part/?ref=snap, Source=TFA16C06DBER.SchLib
AT2: library part CMP-379-000000-3, "RF ATTENUATOR0603 RF ATTENUATOR", Manufacturer Part No=TFA16C03DBER, Mouser Part No=588-TFA16C03DBER, Package=None, Check_prices=https://www.snapeda.com/parts/TFA16C06DBER/Ohmite/view-part/?ref=eda, Component Type=Standard, Design Item ID=TFA16C06DBER, MF=Ohmite, Pin Count=3, SnapEDA_Link=https://www.snapeda.com/parts/TFA16C06DBER/Ohmite/view-part/?ref=snap, Source=TFA16C06DBER.SchLib
C1 C5: library part CMP-001-00071-4, "Multilayer Ceramic Capacitors MLCC - SMD/SMT KGM05CR50G106MH NEW GLOBAL PN 4V 10uF X5 A 581-KGM05CR50G106MH", Case/Package=0402, Manufacturer Part No=04024D106MAT2A, Max Operating Temperature=85°C, Min Operating Temperature=-55°C, Mouser Part No=581-04024D106MAT2A, Tolerance=20%, Voltage Rating=50V, Mounting Technology=SMT, Pins=2
C2 C3 C48: library part CMP-001-00016-6, "Multilayer Ceramic Capacitors MLCC - SMD/SMT 50V 4.7uF X7R 1206 10% HI CV", Capacitor Type=Ceramic, Case/Package=1206, Manufacturer Part No=CC1206KFX7R9BB475, Max Operating Temperature=125°C, Min Operating Temperature=-55°C, Mouser Part No=603-CC1206KFX7R9B475, Tolerance=10%, Voltage Rating=50V, Mounting Technology=SM, Pins=2, RoHS Compliant=True
C4 C8 C11: library part CMP-001-00071-4, "Multilayer Ceramic Capacitors MLCC - SMD/SMT VJ 0402 C0G 221 0.1 Ni barrier 50V Unmarked 7\" reel", Case/Package=0402, Manufacturer Part No=VJ0402A221KXAAC, Max Operating Temperature=85°C, Min Operating Temperature=-55°C, Mouser Part No=77-VJ0402A221KXAAC, Tolerance=20%, Voltage Rating=50V, Mounting Technology=SMT, Pins=2
C6 C7: library part CMP-001-00071-4, "Multilayer Ceramic Capacitors MLCC - SMD/SMT 25V .1uF X7R 0402 10 % -62C Storage Temp", Case/Package=0402, Manufacturer Part No=04023C104KAT2A-62, Max Operating Temperature=85°C, Min Operating Temperature=-55°C, Mouser Part No=581-04023C104KAT2A62, Tolerance=20%, Voltage Rating=50V, Mounting Technology=SMT, Pins=2
C9 C10 C12 C38 C39 C53 C54 C59 C60 C61: library part CMP-001-00071-4, "Multilayer Ceramic Capacitors MLCC - SMD/SMT 50 V 10 pF C0G 0402 1%", Case/Package=0402, Manufacturer Part No=GJM1555C1H1R8CB01J, Max Operating Temperature=85°C, Min Operating Temperature=-55°C, Mouser Part No=81-GJM1555C1H1R8CB1J, Tolerance=20%, Voltage Rating=50V, Mounting Technology=SMT, Pins=2
C13 C44 C45 C57: library part CMP-001-00071-4, "Chip Capacitor, 47nF +/-20%, 50V, 0402, Thickness 0.6 mm", Case/Package=0402, Manufacturer Part No=0402X7R101KT2AT, Max Operating Temperature=85°C, Min Operating Temperature=-55°C, Mouser Part No=581-0402X7R101KT2AT, Tolerance=20%, Voltage Rating=50V, Mounting Technology=SMT, Pins=2